# Altium PCB AFE.PcbDoc (part 1 of 2)
Units mm, origin at the board's own origin, x right, y up, seen from the top; angles counter-clockwise.
Board outline 80 x 100 mm, 4 copper layers (Top Copper, Signal Layer 1, Signal Layer 2, Bottom Copper), stack 1.57 mm thick; 79 components, 51 nets, 246 pads, 287 vias.
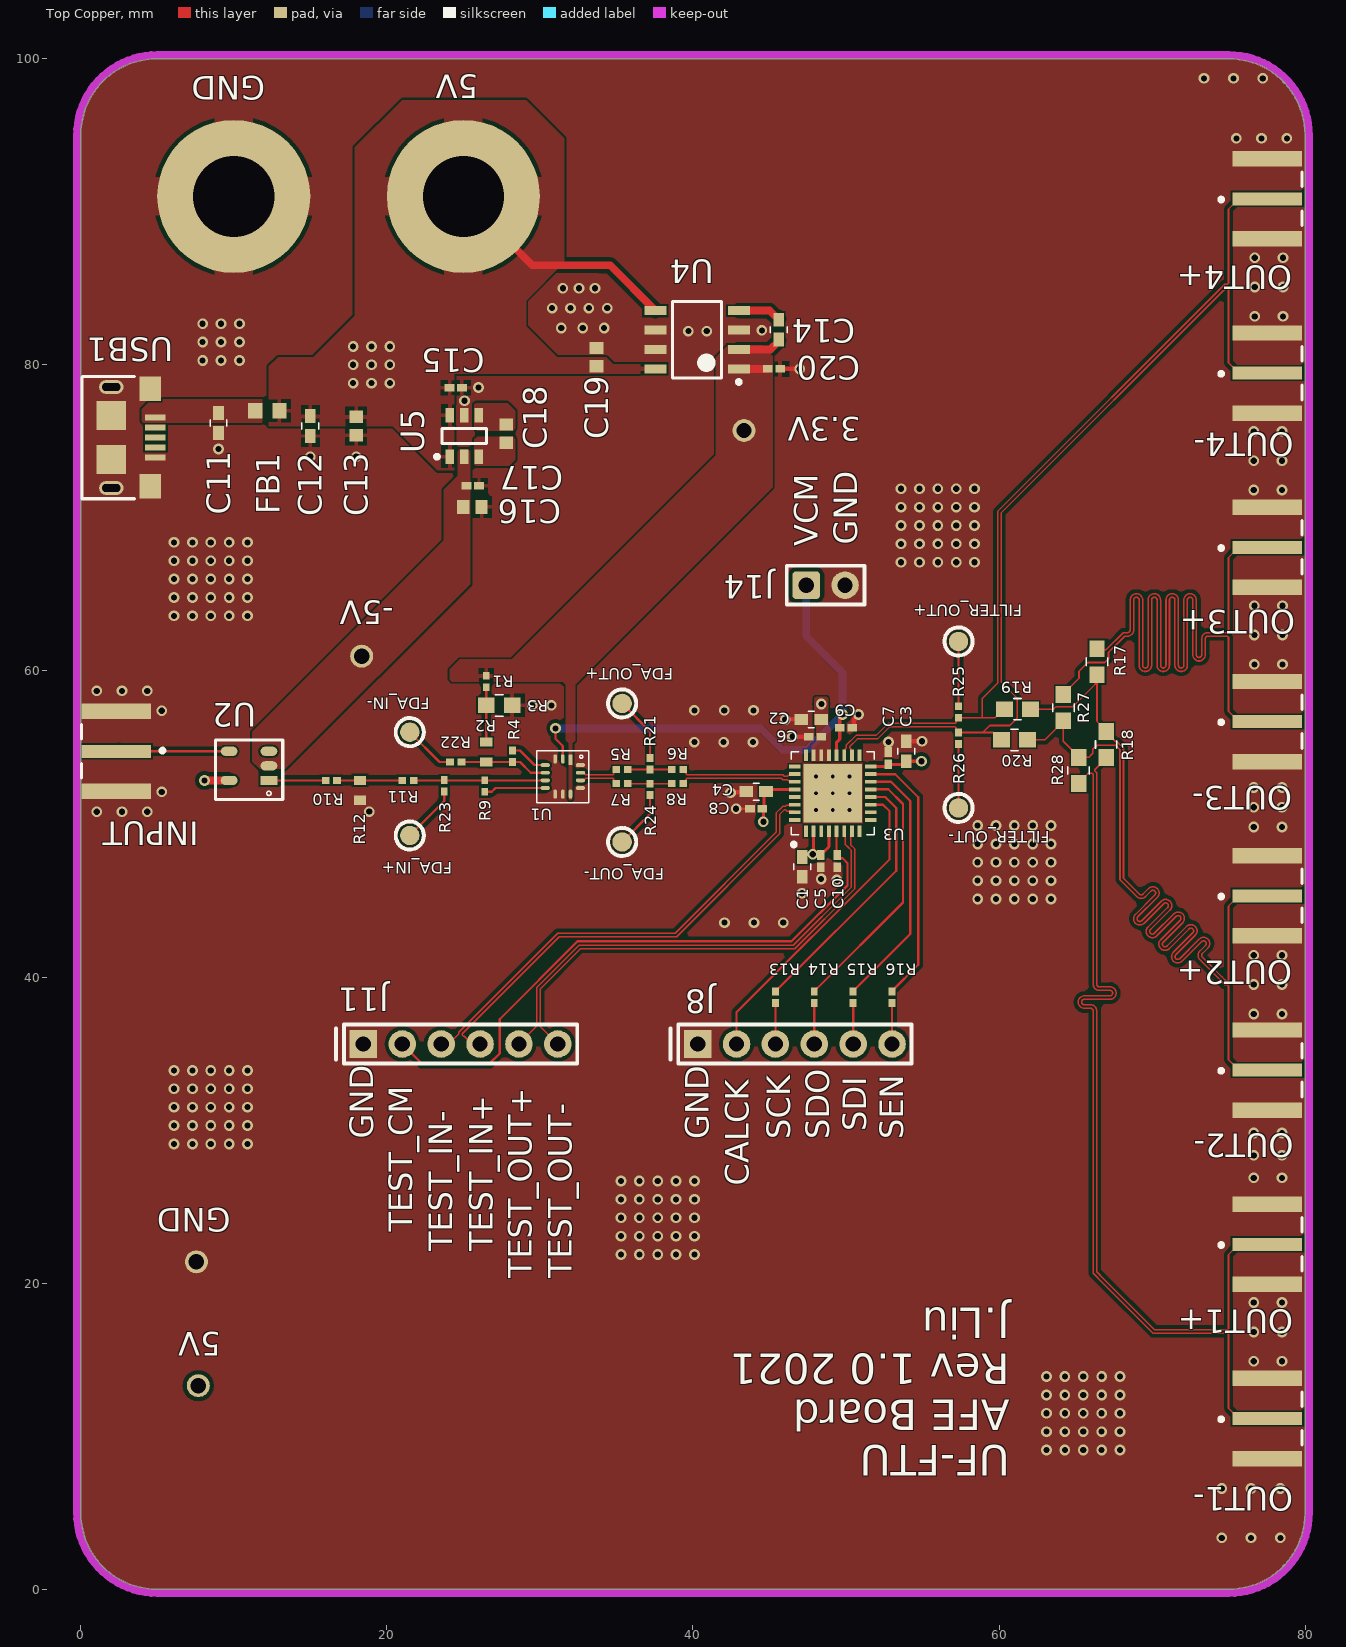
[diagram p0: Top Copper view]
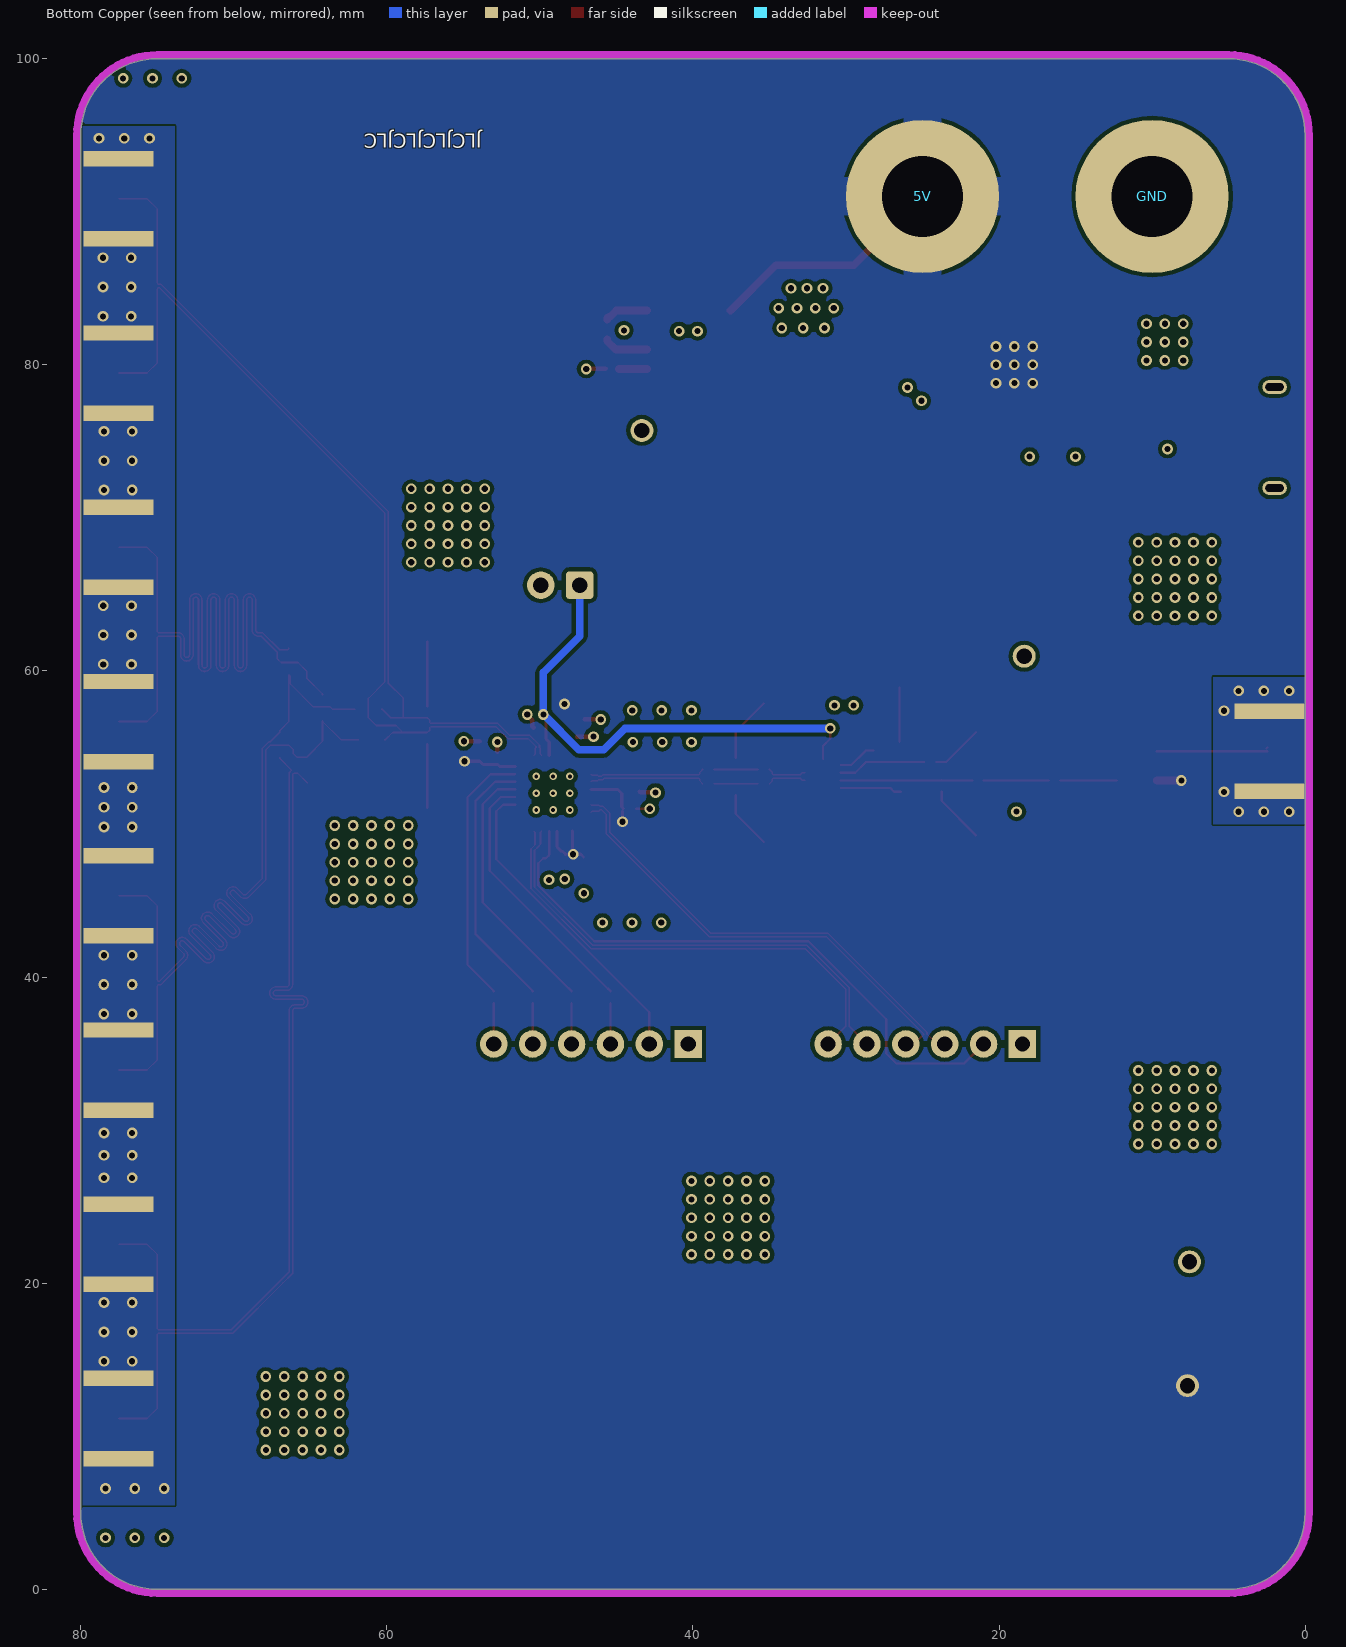
[diagram p1: Bottom Copper view, seen from below]
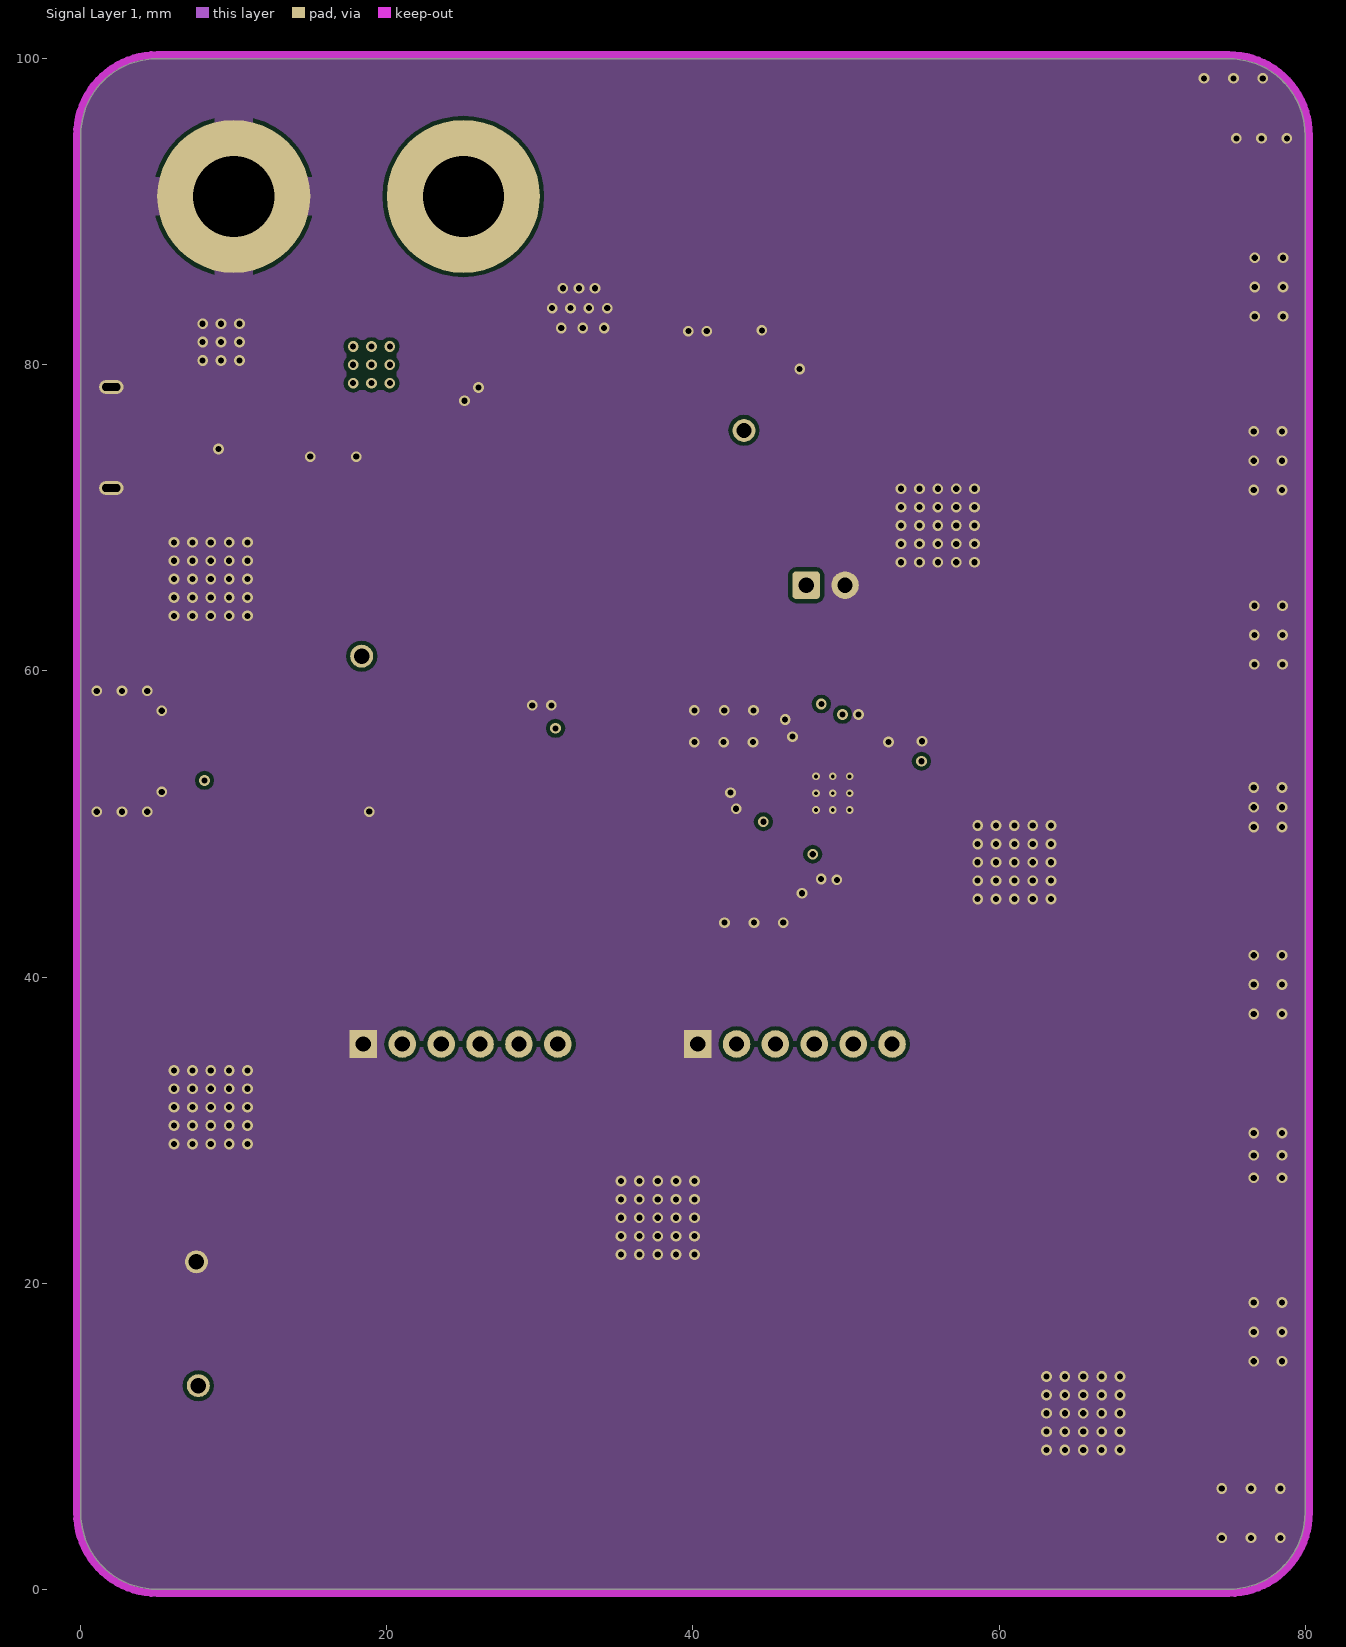
[diagram p2: Signal Layer 1]
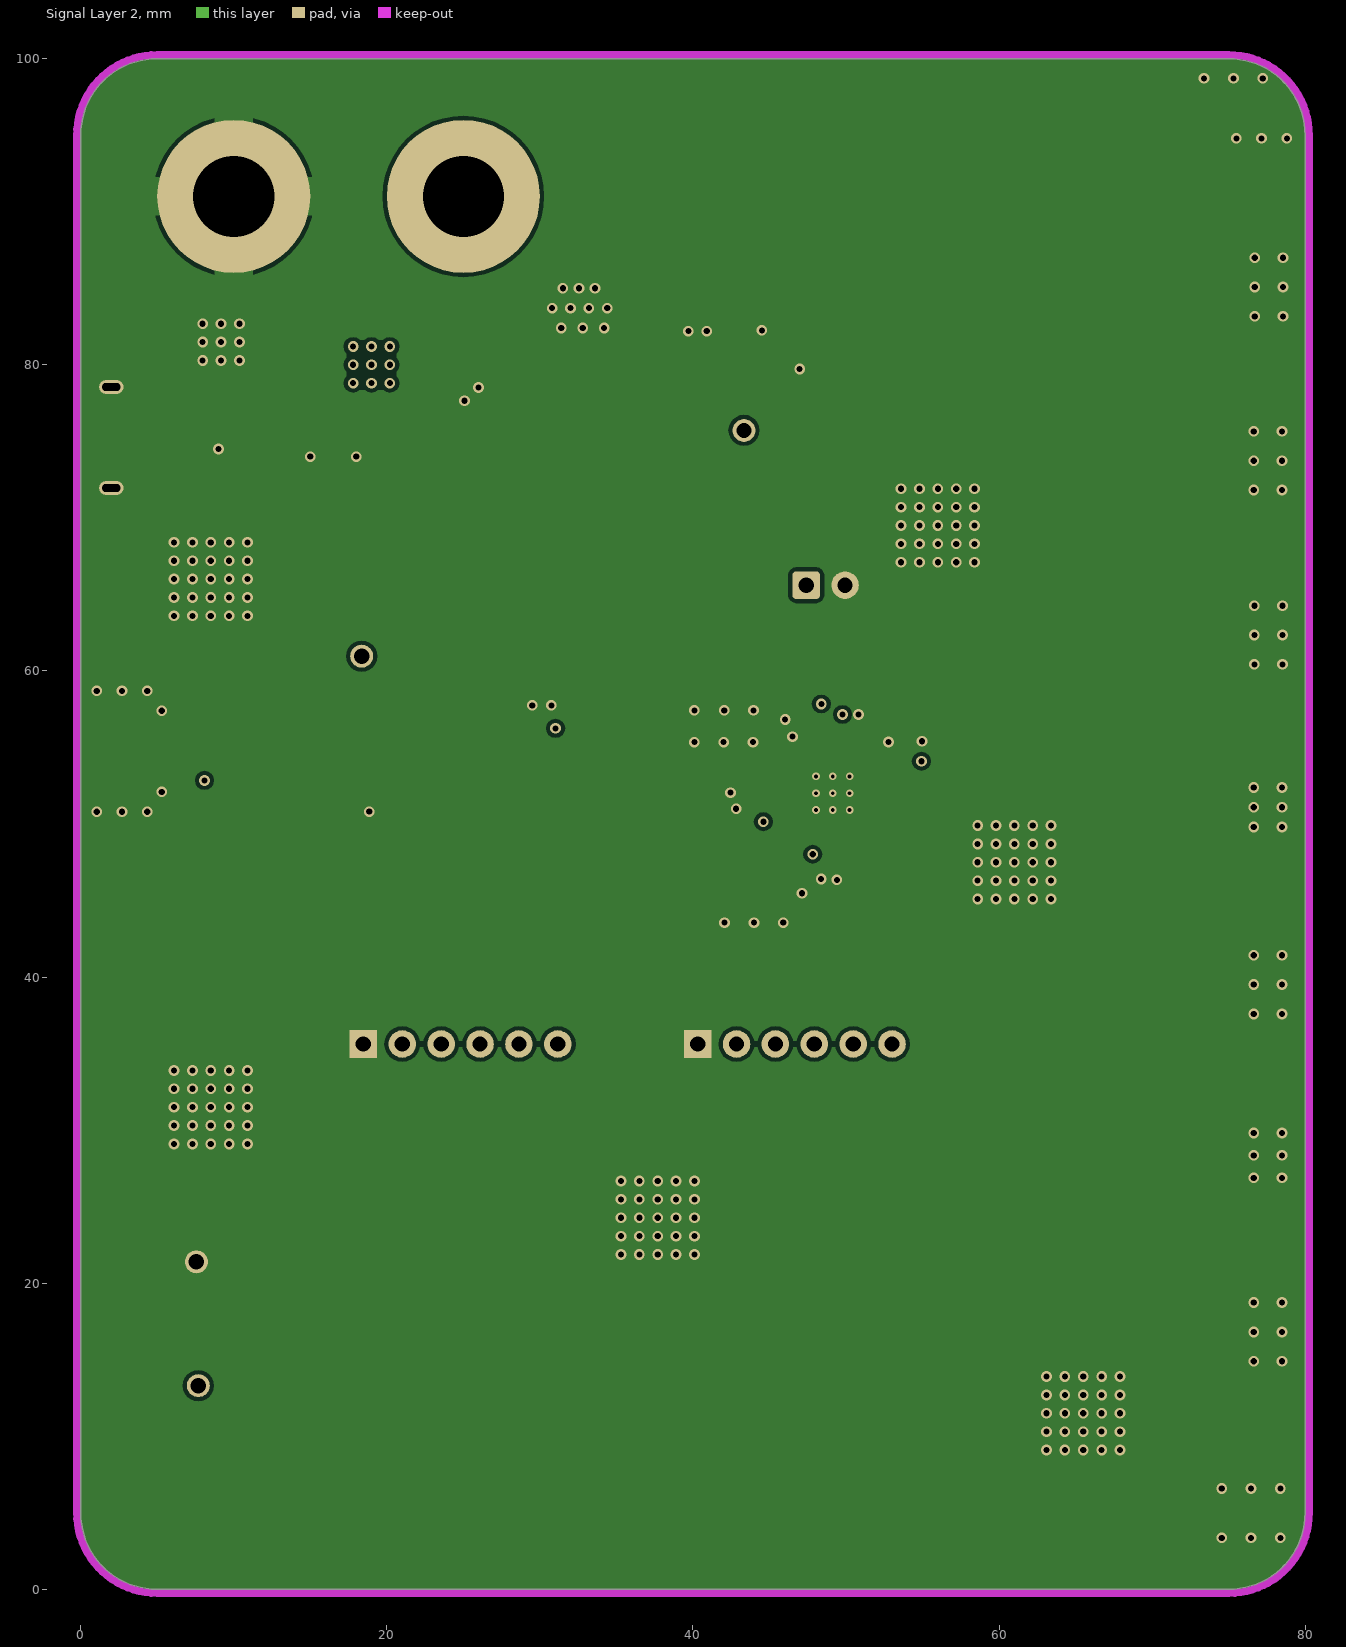
[diagram p3: Signal Layer 2]
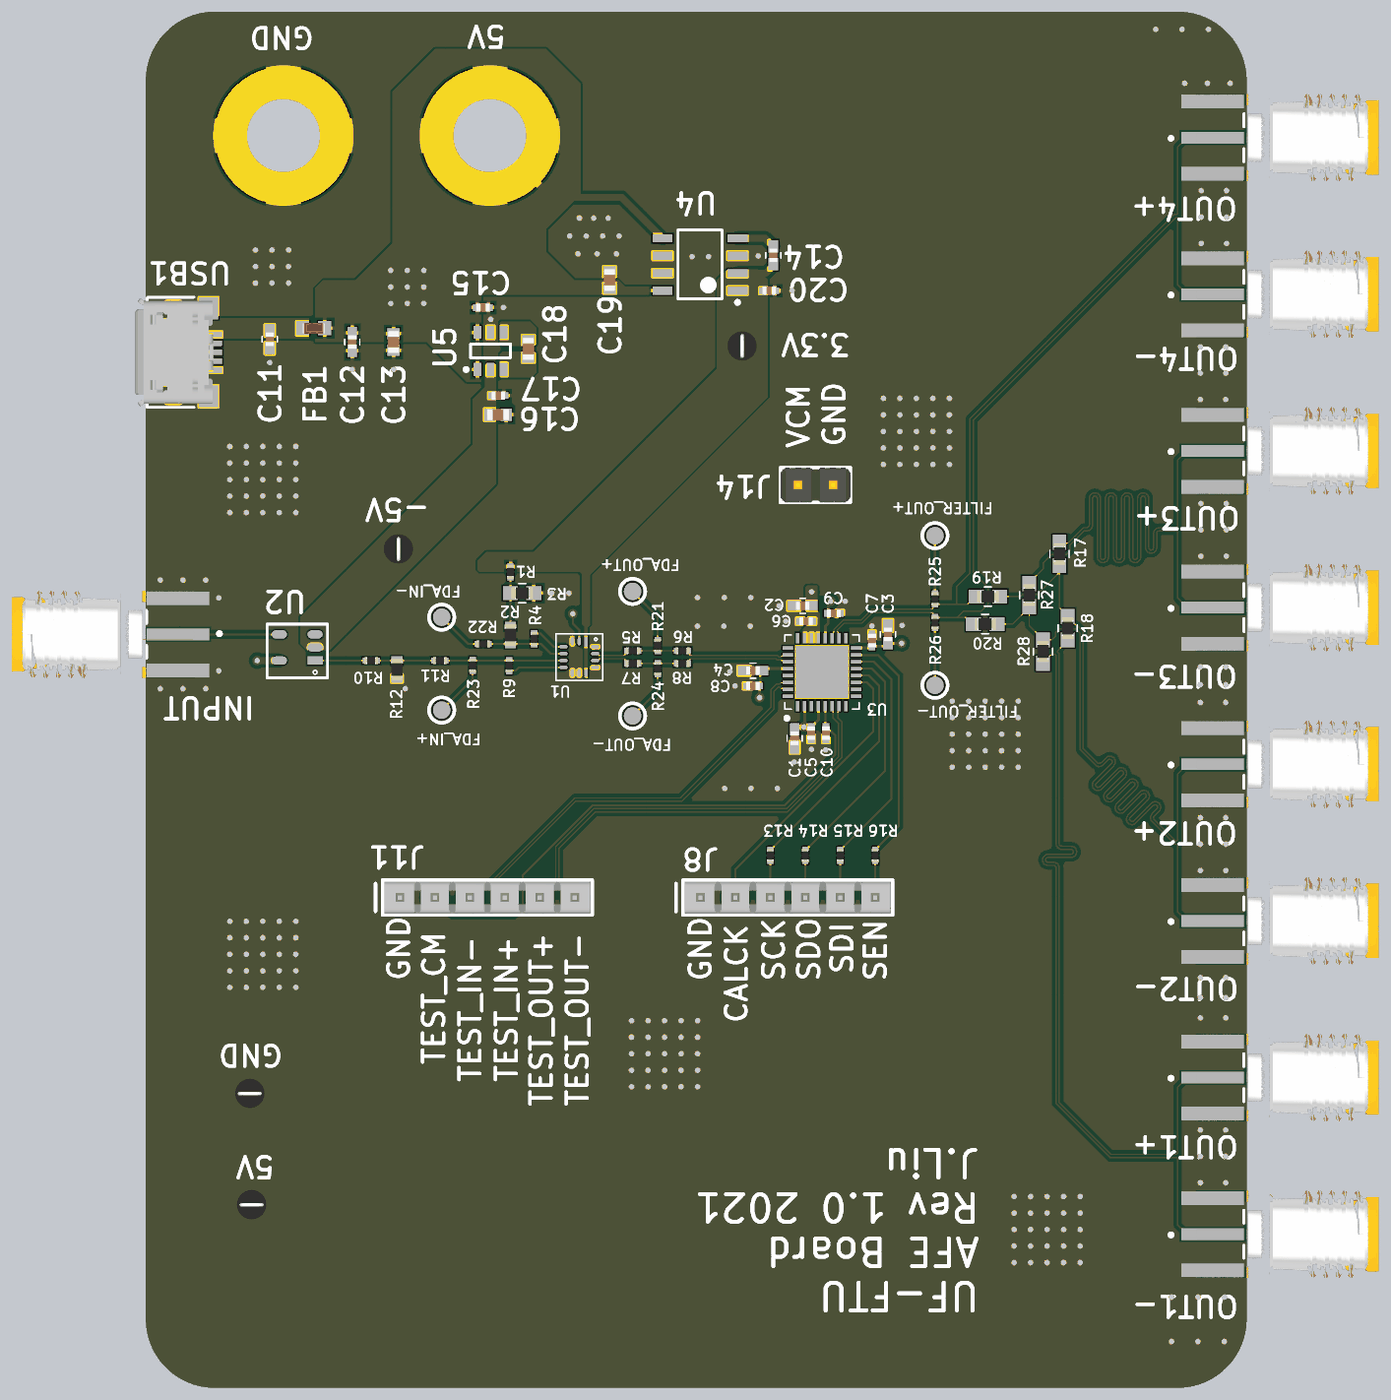
[diagram p4: 3D render of the assembled board from above, using the file's embedded part models]

## Layer stack, top to bottom
Top Mask: solder mask 0.015, Solder Resist, Dk 3.8
Top Copper: signal copper 0.035
Dielectric 1: prepreg 0.1, 2313, Dk 4.05
Signal Layer 1: signal copper 0.0175
Core: core 1.265, FR-4, Dk 4.5
Signal Layer 2: signal copper 0.0175
Dielectric 2: prepreg 0.1, 2313, Dk 4.05
Bottom Copper: signal copper 0.035
Bottom Mask: solder mask 0.015, Solder Resist, Dk 3.8

## Board outline
80,95 ccw(c75,95) 75,100 5,100 ccw(c5,95) 0,95 0,5 ccw(c5,5) 5,0 75,0 ccw(c75,5) 80,5

## Design rules (kind name [scope] priority, off if disabled: settings)
Clearance [All] p1: gap=0.254 ignorepadtopadclearanceinfootprint=FALSE except(0: Arc-Hole Track-Hole SMDPad-Hole THPad-Hole Via-Hole Fill-Hole Poly-Hole Region-Hole Text-Hole; 0.127: Arc-Arc Arc-Track Track-Track SMDPad-SMDPad SMDPad-Fill SMDPad-Poly SMDPad-Region Fill-Fill Fill-Poly Fill-Region Poly-Poly Poly-Region Region-Region; 0.2: Arc-SMDPad Track-SMDPad; 0.5: THPad-THPad)
DiffPairsRouting [InDifferentialPairClass('All Differential Pairs')] p1: maxlimit=0.152 minlimit=0.127 mostfreqgap=0.152 toplayer_maxgap=0.127 toplayer_prefgap=0.127 toplayer_minwidth=0.102 toplayer_maxwidth=0.102 toplayer_prefwidth=0.102 midlayer1_mingap=0.152 midlayer1_minwidth=0.09 midlayer1_maxwidth=0.09 midlayer1_prefwidth=0.09 midlayer2_mingap=0.152 midlayer2_minwidth=0.09 midlayer2_maxwidth=0.09 midlayer2_prefwidth=0.09 bottomlayer_maxgap=0.127 bottomlayer_prefgap=0.127 bottomlayer_minwidth=0.102 bottomlayer_maxwidth=0.102 bottomlayer_prefwidth=0.102 maxuncoupledlength=12.7
HoleSize [All] p1: absolutevalues=TRUE maxlimit=6 minlimit=0.25 maxpercent=80.000 minpercent=20.000
HoleToHoleClearance [All] p1: gap=0.5 allowstackedmicrovias=FALSE
PolygonConnect PolygonConnect_2 [All vs IsNamedPolygon('+5V_L01_P002')] p1: thpad.connectstyle=Relief thpad.reliefconductorwidth=0.254 thpad.reliefentries=4 thpad.polygonreliefangle="90 Angle" thpad.airgapwidth=0.254 smdpad.connectstyle=Relief smdpad.reliefconductorwidth=0.254 smdpad.reliefentries=4 smdpad.polygonreliefangle="90 Angle" smdpad.airgapwidth=0.254 via.connectstyle=Direct via.reliefconductorwidth=0.254 via.reliefentries=4 via.polygonreliefangle="90 Angle" via.airgapwidth=0.254
PolygonConnect PolygonConnect_1 [All vs IsNamedPolygon('+5V_L01_P002')] p2: connectstyle=Direct reliefconductorwidth=0.254 reliefentries=4 polygonreliefangle="90 Angle" airgapwidth=0.254
PolygonConnect [All] p3: connectstyle=Direct reliefconductorwidth=0.254 reliefentries=4 polygonreliefangle="90 Angle" airgapwidth=0.254
RoutingVias [All] p1: holewidth=0.25 width=0.45 viastyle="Through Hole" minholewidth=0.2 minwidth=0.45 maxholewidth=0.4 maxwidth=0.7
SolderMaskExpansion [All] p1: expansion=0.102 istentingtop=FALSE
Width [All] p1: maxlimit=0.508 minlimit=0.089 preferedwidth=0.147 midlayer1_minwidth=0.127 midlayer1_prefwidth=0.131 midlayer2_minwidth=0.127 midlayer2_prefwidth=0.131 minimp=50.000000 maximp=50.000000 favimp=50.000000
27 further rules are at their usual default settings.

## Classes and differential pairs
differential pair AFE_Out4: +AFE_Out1_P -AFE_Out1_N
differential pair AFE_Out3: +AFE_Out2_P -AFE_Out2_N
differential pair AFE_Out2: +AFE_Out3_P -AFE_Out3_N
differential pair AFE_Out1: +AFE_Out4_P -AFE_Out4_N
differential pair FDA_OUT: +FDA_OUT_P -FDA_OUT_N
differential pair FDA_OUT_PR: +FDA_OUT_PR_P -FDA_OUT_PR_N
differential pair TEST_OUT: +TEST_OUT_P -TEST_OUT_N
differential pair TEST_IN: +TEST_IN_P -TEST_IN_N
differential pair FILTER_IN: +FILTER_IN_P -FILTER_IN_N

## Components (designator, comment, footprint, x,y, rotation, side; value= is the part's Value field where it differs from the comment)
3.3V "Testpoint_TH" Testpoint_TH 43.335,75.712 r0 top (schematic designator TP8)
5V "Testpoint_TH" Testpoint_TH 7.687,13.307 r90 top (schematic designator TP7)
5V "Banana Jack" "Banana Jack" 25,91 r180 bottom (schematic designator J12)
-5V "Testpoint_TH" Testpoint_TH 18.357,60.965 r0 top (schematic designator TP9)
C1 "C0402 100pF 50V C0G" C0402-IPC 47.15,47.199 r90 top value=100pF
C2 "C0402 100pF 50V C0G" C0402-IPC 47.733,56.828 r0 top value=100pF
C3 "C0402 100pF 50V C0G" C0402-IPC 53.933,54.752 r270 top value=100pF
C4 "C0402 100pF 50V C0G" C0402-IPC 44.128,52.116 r0 top value=100pF
C5 "GRM155R71H104KE14D" C0402-HIGH-DENSITY 48.35,47.575 r90 top value=0.1uF
C6 "GRM155R71H104KE14D" C0402-HIGH-DENSITY 47.981,55.707 r0 top value=0.1uF
C7 "GRM155R71H104KE14D" C0402-HIGH-DENSITY 52.773,54.303 r270 top value=0.1uF
C8 "GRM155R71H104KE14D" C0402-HIGH-DENSITY 44.128,51.007 r0 top value=0.1uF
C9 "GRM155R71H104KE14D" C0402-HIGH-DENSITY 49.998,56.281 r180 top value=0.1uF
C10 "GRM155R71H104KE14D" C0402-HIGH-DENSITY 49.425,47.575 r90 top value=0.1uF
C11 "C0402 10nF 16V X7R" C0402-IPC 9,76.2 r90 top value=10nF
C12 "C0402 100nF 16V X7R" C0402-IPC 15,76 r90 top value=100nF
C13 "4.7uF, 25V, X5R, 0603" C0603-HIGH-DENSITY 18,76 r90 top value=4.7uF
C14 "C0402 10nF 16V X7R" C0402-IPC 45.6,82.3 r270 top value=10nF
C15 "C0402 10uF 10V" C0402-HIGH-DENSITY 24.5,78.5 r180 top value=10uF
C16 "4.7uF, 25V, X5R, 0603" C0603-HIGH-DENSITY 25.593,70.715 r180 top value=4.7uF
C17 "C0402 10uF 10V" C0402-HIGH-DENSITY 25.619,72.1 r180 top value=10uF
C18 "1uF" C0603-HIGH-DENSITY 27.8,75.5 r90 top
C19 "1uF" C0603-HIGH-DENSITY 33.7,80.5 r270 top
C20 "C0402 10uF 10V" C0402-HIGH-DENSITY 45.3,79.73 r180 top value=10uF
FB1 "BK1608HS220-T" L0603 12.2,77 r0 top
FDA_IN+ "Testpoint_SMT" TESTPOINT_SMT 21.5,49.25 r0 top (schematic designator TP3)
FDA_IN- "Testpoint_SMT" TESTPOINT_SMT 21.5,56 r0 top (schematic designator TP2)
FDA_OUT+ "Testpoint_SMT" TESTPOINT_SMT 35.375,57.875 r0 top (schematic designator TP1)
FDA_OUT- "Testpoint_SMT" TESTPOINT_SMT 35.375,48.825 r0 top (schematic designator TP4)
FILTER_OUT+ "Testpoint_SMT" TESTPOINT_SMT 57.35,61.925 r0 top (schematic designator TP5)
FILTER_OUT- "Testpoint_SMT" TESTPOINT_SMT 57.35,51.05 r0 top (schematic designator TP6)
GND "Testpoint_TH" Testpoint_TH 7.56,21.394 r90 top (schematic designator TP10)
GND "Banana Jack" "Banana Jack" 10,91 r180 bottom (schematic designator J13)
INPUT "SMA" "SMA Edge Launch (Horizontal)" -4.7,54.75 r90 top (schematic designator J1)
J8 "100 mil hdr 6 pos" "100MIL HDR 6 POS" 40.308,35.627 r0 top
J11 "100 mil hdr 6 pos" "100MIL HDR 6 POS" 18.471,35.627 r0 top
J14 "Header 1X2" "Header 1x2 TH Pitch 2.54mm" 47.4,65.6 r0 top
OUT1+ "SMA" "SMA Edge Launch (Horizontal)" 84.55,22.544 r270 top locked (schematic designator J9)
OUT1- "SMA" "SMA Edge Launch (Horizontal)" 84.55,11.16 r270 top locked (schematic designator J10)
OUT2+ "SMA" "SMA Edge Launch (Horizontal)" 84.55,45.312 r270 top locked (schematic designator J6)
OUT2- "SMA" "SMA Edge Launch (Horizontal)" 84.55,33.928 r270 top locked (schematic designator J7)
OUT3+ "SMA" "SMA Edge Launch (Horizontal)" 84.55,68.079 r270 top locked (schematic designator J4)
OUT3- "SMA" "SMA Edge Launch (Horizontal)" 84.55,56.695 r270 top locked (schematic designator J5)
OUT4+ "SMA" "SMA Edge Launch (Horizontal)" 84.55,90.847 r270 top locked (schematic designator J2)
OUT4- "SMA" "SMA Edge Launch (Horizontal)" 84.55,79.463 r270 top locked (schematic designator J3)
R1 "R0402 1k 1%" R0402-HIGH-DENSITY 26.5,59.3 r270 top value=1k
R2 "806R" R0603-HIGH-DENSITY 26.5,54.703 r270 top
R3 "R0603 243 1%" R0603-IPC 27.35,57.75 r180 top value=243
R4 "R0402 1k 1%" R0402-HIGH-DENSITY 28.222,54.428 r90 top value=1k
R5 "R0402 51 1%" R0402-HIGH-DENSITY 35.372,53.56 r0 top value=50
R6 "R0402 0R" R0402-HIGH-DENSITY 39,53.56 r0 top value=0
R7 "R0402 51 1%" R0402-HIGH-DENSITY 35.372,52.64 r0 top value=50
R8 "R0402 0R" R0402-HIGH-DENSITY 39,52.64 r0 top value=0
R9 "R0402 1k 1%" R0402-HIGH-DENSITY 26.399,52.475 r270 top value=1k
R10 "R0402 1k 1%" R0402-HIGH-DENSITY 16.375,52.85 r0 top value=1k
R11 "475R" R0402-HIGH-DENSITY 21.375,52.85 r0 top
R12 "1.07k" R0603-HIGH-DENSITY 18.25,52.2 r90 top
R13 "R0402 100R 1%" R0402-HIGH-DENSITY 45.388,38.685 r270 top value=100
R14 "R0402 100R 1%" R0402-HIGH-DENSITY 47.928,38.685 r270 top value=100
R15 "R0402 100R 1%" R0402-HIGH-DENSITY 50.468,38.685 r270 top value=100
R16 "R0402 100R 1%" R0402-HIGH-DENSITY 53.008,38.685 r270 top value=100
R17 "R0603 0" R0603-IPC 66.4,60.6 r90 top value=0
R18 "R0603 0" R0603-IPC 67,55.2 r270 top value=0
R19 "R0603 0" R0603-IPC 61.2,57.5 r0 top value=0
R20 "R0603 0" R0603-IPC 61,55.5 r0 top value=0
R21 "R0402 0R" R0402-HIGH-DENSITY 37.2,53.935 r270 top value=0
R22 "R0402 0R" R0402-HIGH-DENSITY 24.5,54.053 r0 top value=0
R23 "R0402 0R" R0402-HIGH-DENSITY 23.75,52.5 r90 top value=0
R24 "R0402 0R" R0402-HIGH-DENSITY 37.2,52.265 r90 top value=0
R25 "R0402 0R" R0402-HIGH-DENSITY 57.35,57.317 r270 top value=0
R26 "R0402 0R" R0402-HIGH-DENSITY 57.35,55.602 r90 top value=0
R27 "R0603 0" R0603-IPC 64.2,57.6 r270 top value=0
R28 "R0603 0" R0603-IPC 65.2,53.5 r90 top value=0
U1 "LMH5401" LMH5401 31.5,53.1 r270 top
U2 "LMH6559" LMH6559 11,53.8 r180 top
U3 "HMC1023LP5E" HMC1023 49.137,52.012 r90 top
U4 "LT1763-3.3" LT1763-3.3 40.275,81.635 r180 top
U5 "LTC1983-5" LTC1983-5 25.05,75.35 r90 top
USB1 "USB micro-B" USB-MicroB 2,75.25 r270 top locked

## Footprints (in the part's own frame and the unit in brackets; to place one, negate y for a bottom-side part, rotate by r counter-clockwise, add the part's x,y. Pads: shape width x height; smd on the part's side, far side on the other; paste and mask are expansions set on the pad)
"100MIL HDR 6 POS" [mm]
  rect 1.8x1.8 hole 1: 1(0,0)
  round 1.8 hole 1: 2(2.54,0) 3(5.08,0) 4(7.62,0) 5(10.16,0) 6(12.7,0)
  silkscreen extent -1.78,-1.27 13.97,1.27, body extent -1.12,-1.17 13.82,1.17, height 10.03
"Banana Jack" [mm] "JACK NON-INSULATED .350\""
  round 10 hole 5.3: 1(0,0)
C0402-HIGH-DENSITY [mil] "Chip Capacitor, 2-Leads, Body 1.02x0.51mm, IPC High Density"
  rect 25x19 smd: 1(-16,0) 2(16,0)
  body extent -20,-12 20,12, height 8
C0402-IPC [mm]
  rect 0.9x0.7 smd: 1(-0.65,0) 2(0.65,0)
  silkscreen extent -0.2,-0.55 0.2,0.55, body extent -0.5,-0.3 0.5,0.3, height 0.2
C0603-HIGH-DENSITY [mm] "Chip Capacitor, 2-Leads, Body 1.60x0.80mm, IPC High Density"
  rect 0.8x0.9 smd: 1(-0.6,0) 2(0.6,0)
  body extent -0.8,-0.4 0.8,0.4, height 0.3
"Header 1x2 TH Pitch 2.54mm" [mm] "PinHeader 1x2 TH Pitch 2.54mm"
  rrect25% 1.8x1.8 hole 1: 1(0,0)
  round 1.8 hole 1: 2(2.54,0)
  silkscreen extent -1.27,-1.27 3.81,1.27, body extent -1.27,-1.27 3.81,1.27, height 9.5
HMC1023 [mm] "QFN, 32-Leads, Body 5.00x5.00mm, Pitch 0.50mm, Thermal Pad 3.80x3.80mm, IPC Medium Density"
  rect 0.75x0.25 smd: 1(-2.475,1.75) 2(-2.475,1.25) 3(-2.475,0.75) 4(-2.475,0.25) 5(-2.475,-0.25) 6(-2.475,-0.75) 7(-2.475,-1.25) 8(-2.475,-1.75) 17(2.475,-1.75) 18(2.475,-1.25) 19(2.475,-0.75) 20(2.475,-0.25) 21(2.475,0.25) 22(2.475,0.75) 23(2.475,1.25) 24(2.475,1.75)
  rect 0.25x0.75 smd: 9(-1.75,-2.475) 10(-1.25,-2.475) 11(-0.75,-2.475) 12(-0.25,-2.475) 13(0.25,-2.475) 14(0.75,-2.475) 15(1.25,-2.475) 16(1.75,-2.475) 25(1.75,2.475) 26(1.25,2.475) 27(0.75,2.475) 28(0.25,2.475) 29(-0.25,2.475) 30(-0.75,2.475) 31(-1.25,2.475) 32(-1.75,2.475)
  rect 3.8x3.8 smd: 33(0,0)
  silkscreen extent -3.47,-2.7 2.7,2.7, body extent -2.55,-2.55 2.55,2.55, height 1
L0603 [mm]
  rect 0.94x1.02 smd: 1(-0.79,0) 2(0.79,0)
  body extent -0.8,-0.4 0.8,0.4, height 1
LMH5401 [mm]
  rect 0.7x0.25 smd: 1(-1.1,0.5)
  oval 0.6x0.25 smd: 2(-1.15,0) 3(-1.15,-0.5) 8(1.15,-0.5) 9(1.15,0) 10(1.15,0.5)
  oval 0.25x0.6 smd: 4(-0.75,-1.15) 5(-0.25,-1.15) 6(0.25,-1.15) 7(0.75,-1.15) 11(0.75,1.15) 12(0.25,1.15) 13(-0.25,1.15) 14(-0.75,1.15)
  silkscreen extent -1.7,-1.7 1.7,1.7
LMH6559 [mm]
  rect 1.1x0.6 smd mask+0.07: 1(-1.3,0.95)
  oval 1.1x0.6 smd mask+0.07: 2(-1.3,0) 3(-1.3,-0.95) 4(1.3,-0.95) 5(1.3,0.95)
  silkscreen extent -2.2,-1.7 2.2,2.2
LT1763-3.3 [mm] "SOIC, 8-Leads, Body 4.90x3.90mm, Pitch 1.27mm, IPC Medium Density"
  rect 1.45x0.6 smd: 1(-2.725,1.905) 2(-2.725,0.635) 3(-2.725,-0.635) 4(-2.725,-1.905) 5(2.725,-1.905) 6(2.725,-0.635) 7(2.725,0.635) 8(2.725,1.905)
  silkscreen extent -2.85,-2.5 1.6,2.88, body extent -2,-2.5 2,2.5, height 1.76
LTC1983-5 [mm] "SOT23, 6-Leads, Body 2.90x2.80mm, Pitch 0.95mm, IPC Medium Density"
  rect 0.95x0.55 smd: 1(-1.35,0.95) 2(-1.35,0) 3(-1.35,-0.95) 4(1.35,-0.95) 5(1.35,0) 6(1.35,0.95)
  silkscreen extent -1.47,-1.45 0.5,1.9, body extent -0.87,-1.45 0.87,1.45, height 1
R0402-HIGH-DENSITY [mm] "Chip Resistor, 2-Leads, Body 1.00x0.50mm, IPC High Density"
  rect 0.5x0.45 smd: 1(-0.375,0) 2(0.375,0)
  body extent -0.5,-0.25 0.5,0.26, height 0.34
R0603-HIGH-DENSITY [mm] "Chip Resistor, 2-Leads, Body 1.60x0.80mm, IPC High Density"
  rect 0.6x0.8 smd: 1(-0.65,0) 2(0.65,0)
  body extent -0.77,-0.43 0.78,0.43, height 0.44
R0603-IPC [mm]
  rect 1.1x1 smd: 1(-0.85,0) 2(0.85,0)
  silkscreen extent -0.25,-0.7 0.25,0.7, body extent -0.77,-0.43 0.78,0.43, height 0.44
"SMA Edge Launch (Horizontal)" [mm]
  rect 0.85x4.56 smd paste+0 mask+0: 1(0,-7.03)
  rect 1x4.56 smd paste+0 mask+0: 2(-2.62,-7.03) 2(2.62,-7.03)
  rect 1x4.56 smd far side paste+0 mask+0: 2(-2.62,-7.03) 2(2.62,-7.03)
  silkscreen extent -1.75,-10.17 1.75,-4.75, body extent -3.19,-8.25 3.19,5.05, height 3.58
TESTPOINT_SMT [mm]
  round 1.27 smd: 1(0,0)
  silkscreen extent -0.92,-0.92 0.92,0.92
Testpoint_TH [mm]
  round 1.5 hole 1: 1(0,0)
  body extent -1.07,-1.07 1.07,1.06, height 4.57
USB-MicroB [mm] "CONN RCPT USB TYPE B 3A"
  oval 0.9x1.6 hole 0.5 slot 1.2 at 90 deg: 0(-3.3,0) 0(3.3,0)
  rect 1.6x1.4 smd: 0(-3.2,2.55) 0(3.2,2.55)
  rect 1.9x1.9 smd: 0(-1.45,0) 0(1.45,0)
  rect 0.4x1.35 smd: 1(-1.3,2.875) 2(-0.65,2.875) 3(0,2.875) 4(0.65,2.875) 5(1.3,2.875)
  silkscreen extent -4,-1.9 4,1.5, body extent -3.93,-2.76 3.93,2.9, height 2.88

## Part data
3.3V 5V -5V GND: "Through-hole testpoint hook"
5V GND: "JACK NON-INSULATED .350\"", Supplier Part Number 1=36-575-8-ND, Supplier 1=Digi-Key
C1 C2 C3 C4: "Chip Capacitor, 0402, 100p, 1%, 50V, C0G", Max. Voltage=50V, Supplier Part Number 1=490-7753-1-ND, EIA Code=C0G, Supplier 1=Digi-Key
C5 C6 C7 C8 C9 C10: library part "C0402 0.1uF 50V X7R", "Chip Capacitor, 0402, 0.10uF, 50V, X7R", Supplier Part Number 1=490-10700-1-ND, Supplier 1=Digi-Key
C11 C14: "Chip Capacitor, 0402, 10nF, 16V, X7R", Max. Voltage=16V, Supplier Part Number 1=490-1313-1-ND, EIA Code=X5R, Supplier 1=Digi-Key
C12: "Chip Capacitor, 0402, 100nF, 16V, X7R", Max. Voltage=16V, Supplier Part Number 1=490-6328-1-ND, EIA Code=X5R, Supplier 1=Digi-Key
C13 C16: library part "C0603 4.7uF 25V X5R", "Chip Capacitor, 0603, 4.7uF, 25V, X5R", Max. Voltage=25V, Supplier Part Number 1=490-7203-1-ND, EIA Code=X5R, Supplier 1=Digi-Key, Supplier 2=Mouser, Supplier 3=LCSC, Supplier Part Number 2=81-GRM188R61E475KE1D, Supplier Part Number 3=C90057
C15 C17 C20: "Chip Capacitor, 0402, 10uF, 10V, X5R", Max. Voltage=10V, Supplier Part Number 1=1276-1450-2-ND, EIA Code=X5R, Supplier 1=Digi-Key
C18 C19: library part "1uF 0603 35V X5R", "CAP CER 1UF 35V X5R 0603", Case/Package=0603, Manufacturer="Taiyo Yuden", Manufacturer Part Number=GMK107BJ105MAHT, Max Operating Temperature=85°C, Min Operating Temperature=-55°C, Ratings=AEC-Q200, Supplier Part Number 1=587-6315-1-ND, Tolerance=20%, Voltage Rating=35V, Capacitance=1uF, Category="Ceramic Capacitors", ComponentLink1Description=http://ds.yuden.co.jp/TYCOMPAS/ut/detail.do?productNo=GMK107BJ105MAHT&amp;fileName=GMK107BJ105MAHT_SS&amp;mode=specSheetDownload&src-supplier=Digi-Key, ComponentLink1URL=http://ds.yuden.co.jp/TYCOMPAS/ut/detail.do?productNo=GMK107BJ105MAHT&amp;fileName=GMK107BJ105MAHT_SS&amp;mode=specSheetDownload&src-supplier=Digi-Key, Mount="Surface Mount", Packaging="Tape and Reel", Pricing 1="1=0.19000, 10=0.13300, 50=0.07960, 100=0.06730, 500=0.04604, 1000=0.04073 (USD)", RoHS=Yes, RoHS Compliant=Yes, Stock 1=1779, Supplier 1=Digi-Key
FB1: "Ferrite Beads Multi-Layer 22Ohm 25% 100MHz 1.5A 0.05Ohm DCR 0603 T/R", Case Code (Imperial)=0603, Case Code (Metric)=1608, DC Resistance (DCR)=50mR, Frequency=100MHz, Manufacturer="Taiyo Yuden", Max Current Rating=1.5A, Max Operating Temperature=125°C, Min Operating Temperature=-55°C, Package Quantity=1, Supplier Part Number 1=587-1869-1-ND, Tolerance=25%, Case/Package=0603, Category="Ferrite Beads and Chips", ComponentLink1Description=https://datasheet.ciiva.com/1011/bk1608hs220-t-ss-1011861.pdf?src-supplier=Digi-Key, ComponentLink1URL=https://datasheet.ciiva.com/1011/bk1608hs220-t-ss-1011861.pdf?src-supplier=Digi-Key, ComponentLink2Description=https://datasheet.ciiva.com/1011/mlci07-e-1011862.pdf?src-supplier=Digi-Key, ComponentLink2URL=https://datasheet.ciiva.com/1011/mlci07-e-1011862.pdf?src-supplier=Digi-Key, ComponentLink3Description=https://datasheet.ciiva.com/1011/mlci07-e-1011863.pdf?src-supplier=Digi-Key, ComponentLink3URL=https://datasheet.ciiva.com/1011/mlci07-e-1011863.pdf?src-supplier=Digi-Key, ComponentLink4Description=https://datasheet.ciiva.com/5821/mlci07-e-5821271.pdf?src-supplier=Farnell, ComponentLink4URL=https://datasheet.ciiva.com/5821/mlci07-e-5821271.pdf?src-supplier=Farnell, ComponentLink5Description=https://datasheet.ciiva.com/7620/1734576-7620028.pdf?src-supplier=Element14, ComponentLink5URL=https://datasheet.ciiva.com/7620/1734576-7620028.pdf?src-supplier=Element14, Core Material=Ferrite, Depth=0.95mm, Halogen Free="Halogen Free", Height=0.037inch, Impedance=22R, Lead Free="Lead Free", Length=0.063inch, Manufacturer Part Number=BK1608HS220-T, Max DC Current=1.5A, Mount="Surface Mount", Number of Lines=1, Number of Pins=2, Packaging="Tape and Reel", Pricing 1="1=0.10000, 10=0.07200, 25=0.06560, 50=0.05900, 100=0.04320, 250=0.03144, 500=0.02882, 1000=0.02489 (USD)", REACH SVHC="No SVHC", Resistance=50mR, RoHS=Yes, RoHS Compliant=Yes, Series=BK, Shielding=Shielded, Stock 1=23669, Supplier 1=Digi-Key, Termination=SMD/SMT, Test Frequency=100MHz, Width=0.031inch
FDA_IN+ FDA_IN- FDA_OUT+ FDA_OUT- FILTER_OUT+ FILTER_OUT-: "SMT Test Point"
INPUT OUT1+ OUT1- OUT2+ OUT2- OUT3+ OUT3- OUT4+ OUT4-: "SMA Connector", Supplier Part Number 1=A97594-ND, Supplier 1=Digi-Key
J8 J11: "Header, 100 mil, 6pos, tin", Supplier Part Number 1=A31116-ND, Supplier 1=Digi-Key
R1 R4 R9 R10: "Chip Resistor, 0402, 1k ohms, 1%, 1/16 W", Supplier Part Number 1=311-1.00KLRCT-ND, Supplier 1=Digi-Key
R2: library part "806R 0603 0.5% 1/10W", "RES 806 OHM 0.5% 1/10W 0603", Case/Package=0603, Manufacturer="Stackpole Electronics", Manufacturer Part Number=RNCF0603DTE806R, Max Operating Temperature=155°C, Min Operating Temperature=-55°C, Power Rating=63mW, Supplier Part Number 1=RNCF0603DTE806RCT-ND, Tolerance=0.5%, Category="Chip SMD Resistors", ComponentLink1Description=https://www.seielect.com/catalog/sei-rncf.pdf?src-supplier=Digi-Key, ComponentLink1URL=https://www.seielect.com/catalog/sei-rncf.pdf?src-supplier=Digi-Key, Mount="Surface Mount", Packaging="Tape and Reel", Pricing 1="1=0.13000, 10=0.11000, 100=0.04300, 1000=0.01800, 2500=0.01650 (USD)", Resistance=806R, RoHS=Yes, RoHS Compliant=Yes, Stock 1=7286, Supplier 1=Digi-Key
R3: "RES SMD 243 OHM 1% 1/10W 0603", Operating Temperature="-55°C ~ 155°C", Supplier Part Number 1=RMCF0603FT243RCT-ND, Temperature Coefficient=±100ppm/°C, Tolerance=±1%, Features="Automotive AEC-Q200", Supplier 1=Digi-Key
R5 R7: "Chip Resistor, 0402, 50 ohms, 1%, 1/10 W"
R6 R8 R21 R22 R23 R24 R25 R26: "Chip Resistor, 0402, 0 ohm jumper", Supplier Part Number 1=311-0.0JRCT-ND, Supplier 1=Digi-Key
R11: library part "475R 0402 1% 1/5W", "RES SMD 475 OHM 1% 1/5W 0402", Case/Package=0402, Manufacturer="Vishay Dale", Manufacturer Part Number=CRCW0402475RFKEDHP, Max Operating Temperature=155°C, Max Power Dissipation=125mW, Min Operating Temperature=-55°C, Package Quantity=10000, Resistor Type="Thick Film", Supplier Part Number 1=541-CRCW0402475RFKEDHPCT-ND, Temperature Coefficient=100ppm/°C, Tolerance=1%, Category="Chip SMD Resistors", ComponentLink1Description=https://datasheet.ciiva.com/8898/crcwhpe3-8898762.pdf?src-supplier=Avnet, ComponentLink1URL=https://datasheet.ciiva.com/8898/crcwhpe3-8898762.pdf?src-supplier=Avnet, ComponentLink2Description=https://datasheet.ciiva.com/2573/crcwhpe3-2573100.pdf?src-supplier=Digi-Key, ComponentLink2URL=https://datasheet.ciiva.com/2573/crcwhpe3-2573100.pdf?src-supplier=Digi-Key, Contact Plating=Tin, Features="Automotive AEC-Q200", Height=0.016inch, Lead Free="Lead Free", Length=0.039inch, Number of Terminations=2, Packaging="Tape and Reel", Pricing 1="1=0.14000, 10=0.12600, 100=0.04840, 1000=0.02130, 2500=0.01839, 5000=0.01646 (USD)", Radiation Hardening=No, Resistance=475R, RoHS=Yes, RoHS Compliant=Yes, Series=CRCW-HP, Stock 1=9500, Supplier 1=Digi-Key, Width=0.02inch
R12: library part "1.07k 0603 1% 1/10W", "RES SMD 1.07K OHM 1% 1/10W 0603", Case Code (Imperial)=0603, Case Code (Metric)=1608, Manufacturer="Stackpole Electronics", Manufacturer Part Number=RMCF0603FT1K07, Max Operating Temperature=155°C, Max Power Dissipation=100mW, Min Operating Temperature=-55°C, Resistance=1.07kR, Resistor Type="Thick Film", Supplier Part Number 1=RMCF0603FT1K07CT-ND, Temperature Coefficient=100ppm/°C, Tolerance=1%, Case/Package=0603, Category="Chip SMD Resistors", ComponentLink1Description=https://www.seielect.com/catalog/SEI-RMCF_RMCP.pdf?src-supplier=Avnet, ComponentLink1URL=https://www.seielect.com/catalog/SEI-RMCF_RMCP.pdf?src-supplier=Avnet, ComponentLink2Description=https://www.seielect.com/Catalog/SEI-RMCF_RMCP.pdf?src-supplier=Digi-Key, ComponentLink2URL=https://www.seielect.com/Catalog/SEI-RMCF_RMCP.pdf?src-supplier=Digi-Key, ComponentLink3Description=https://www.seielect.com/catalog/SEI-Packaging.pdf?src-supplier=Digi-Key, ComponentLink3URL=https://www.seielect.com/catalog/SEI-Packaging.pdf?src-supplier=Digi-Key, Contact Plating=Tin,Matte, Features="Automotive AEC-Q200", Height=0.022inch, Lead Free="Lead Free", Length=0.061inch, Mount="Surface Mount", Number of Terminations=2, Packaging="Tape and Reel", Pricing 1="1=0.10000, 10=0.01600, 100=0.00650, 1000=0.00292, 2500=0.00253 (USD)", Radiation Hardening=No, RoHS=Yes, RoHS Compliant=Yes, Series=RMCF, Stock 1=16341, Supplier 1=Digi-Key, Width=0.031inch
R13 R14 R15 R16: "Chip Resistor, 0402, 100 ohms, 1%, 1/16 W", Supplier Part Number 1=311-100LRCT-ND, Supplier 1=Digi-Key
R17 R18 R19 R20 R27 R28: "RES SMD 0 OHM JUMPER 1/10W 0603", Supplier Part Number 1=RMCF0603ZT0R00CT-ND, Supplier 1=Digi-Key
U1: "TEXAS INSTRUMENTS - LMH5401IRMST - DIFF AMP, 6.2GHZ, 17.5KV/US, UQFN-14", Frequency=2GHz, Manufacturer="Texas Instruments", Manufacturer Part Number=LMH5401IRMST, Max Dual Supply Voltage=2.625V, Max Operating Temperature=85°C, Max Supply Voltage=5.25V, Min Dual Supply Voltage=1.575V, Min Operating Temperature=-40°C, Min Supply Voltage=3.15V, Operating Supply Current=55mA, Operating Supply Voltage=5V, Output Current per Channel=50mA, Package Quantity=250, Supplier Part Number 1=296-38513-1-ND, -3db Bandwidth=1.2GHz, Bandwidth=8GHz, Category="Amplifiers - Op Amps, Buffer, Instrumentation", ComponentLink1Description=https://datasheet.ciiva.com/48505/lmh5401-48505045.pdf?src-supplier=Avnet, ComponentLink1URL=https://datasheet.ciiva.com/48505/lmh5401-48505045.pdf?src-supplier=Avnet, Gain=6dB, Gain Bandwidth Product=8GHz, Lead Free="Lead Free", Mount="Surface Mount", Number of Amplifiers=1, Number of Channels=1, Number of Circuits=1, Number of Pins=14, Packaging="Tape and Reel", Pricing 1="1=17.26000, 10=15.86500, 25=15.20760, 100=12.74150 (USD)", REACH SVHC="No SVHC", RoHS=Yes, RoHS Compliant=Yes, Slew Rate=17500V/µs, Stock 1=1716, Supplier 1=Digi-Key, Weight=0.000353oz
U2: "OP Amp Buffer Single GP 10V 5-Pin SOT-23 T/R", Case/Package=SOT-23, Input Bias Current=3uA, Input Offset Voltage (Vos)=3mV, Manufacturer="TI National Semiconductor", Manufacturer Part Number=LMH6559MF/NOPB, Max Operating Temperature=85°C, Max Supply Voltage=10V, Min Dual Supply Voltage=1.5V, Min Operating Temperature=-40°C, Min Supply Voltage=3V, Nominal Supply Current=10mA, Operating Supply Voltage=5V, Output Current=75mA, Output Current per Channel=74mA, Package Quantity=1000, Power Supply Rejection Ratio (PSRR)=44dB, Supplier Part Number 1=LMH6559MF/NOPBCT-ND, Voltage Gain=59.98dB, -3db Bandwidth=1.75GHz, Amplifier Type=BUFFER, Bandwidth=1.75GHz, Category="Amplifiers - Op Amps, Buffer, Instrumentation", ComponentLink1Description=https://datasheet.ciiva.com/15130/getdatasheetpartid-68437-15130143.pdf?src-supplier=Verical, ComponentLink1URL=https://datasheet.ciiva.com/15130/getdatasheetpartid-68437-15130143.pdf?src-supplier=Verical, ComponentLink2Description=https://datasheet.ciiva.com/2975/lmh6559-2975204.pdf?src-supplier=Avnet, ComponentLink2URL=https://datasheet.ciiva.com/2975/lmh6559-2975204.pdf?src-supplier=Avnet, ComponentLink3Description=https://datasheet.ciiva.com/2975/lmh6559-2975205.pdf?src-supplier=Avnet, ComponentLink3URL=https://datasheet.ciiva.com/2975/lmh6559-2975205.pdf?src-supplier=Avnet, ComponentLink4Description=https://datasheet.ciiva.com/6630/lmh6559-6630632.pdf?src-supplier=Digi-Key, ComponentLink4URL=https://datasheet.ciiva.com/6630/lmh6559-6630632.pdf?src-supplier=Digi-Key, ComponentLink5Description=https://datasheet.ciiva.com/6630/lmh6559-6630633.pdf?src-supplier=Digi-Key, ComponentLink5URL=https://datasheet.ciiva.com/6630/lmh6559-6630633.pdf?src-supplier=Digi-Key, ComponentLink6Description=https://datasheet.ciiva.com/6630/lmh6559-6630634.pdf?src-supplier=Digi-Key, ComponentLink6URL=https://datasheet.ciiva.com/6630/lmh6559-6630634.pdf?src-supplier=Digi-Key, ComponentLink7Description=https://datasheet.ciiva.com/4756/lmh6559-4756997.pdf?src-supplier=Mouser, ComponentLink7URL=https://datasheet.ciiva.com/4756/lmh6559-4756997.pdf?src-supplier=Mouser, ComponentLink8Description=https://datasheet.ciiva.com/14094/lmh6559-eng-tds-14094141.pdf?src-supplier=Distrelec, ComponentLink8URL=https://datasheet.ciiva.com/14094/lmh6559-eng-tds-14094141.pdf?src-supplier=Distrelec, ComponentLink9Description=https://datasheet.ciiva.com/26223/lmh6559-26223561.pdf?src-supplier=Avnet+Europe, ComponentLink9URL=https://datasheet.ciiva.com/26223/lmh6559-26223561.pdf?src-supplier=Avnet+Europe, Height=1.02mm, Lead Free="Lead Free", Length=2.92mm, Mount="Surface Mount", Number of Amplifiers=1, Number of Channels=1, Number of Circuits=1, Number of Elements=1, Number of Pins=5, Packaging="Tape and Reel", Pricing 1="1=2.89000, 10=2.59800, 25=2.45640, 100=2.01980, 250=1.81240, 500=1.74688 (USD)", Radiation Hardening=No, REACH SVHC="No SVHC", RoHS=No, Series=-, Slew Rate=4580V/µs, Stock 1=2784, Supplier 1=Digi-Key, Supply Current=10mA, Termination=SMD/SMT, Width=1.6mm
U3: "Active Filter Dual Low Pass Filter 6th Order 72MHz 32-Pin QFN Bulk", Case/Package=QFN, Frequency=100MHz, Manufacturer="Analog Devices", Max Frequency=72MHz, Max Operating Temperature=85°C, Max Supply Voltage=5.25V, Min Operating Temperature=-40°C, Min Supply Voltage=4.75V, Operating Supply Voltage=5V, Package Quantity=1, Supplier Part Number 1=1127-1662-ND, Bandwidth=72MHz, Category="Integrated Circuits (ICs)", ComponentLink1Description=https://datasheet.ciiva.com/29361/hmc1023lp5-29361744.pdf?src-supplier=Digi-Key, ComponentLink1URL=https://datasheet.ciiva.com/29361/hmc1023lp5-29361744.pdf?src-supplier=Digi-Key, Contact Plating=Tin,Matte, Height=0.039inch, Lead Free="Contains Lead", Length=0.197inch, Manufacturer Part Number=HMC1023LP5E, Mount="Surface Mount", Number of Channels=2, Number of Circuits=2, Number of Pins=32, Packaging="Cut Tape", Pricing 1="1=25.14000, 10=24.35000, 25=23.56480, 50=22.77960, 100=21.99400, 250=20.89432 (USD)", REACH SVHC=Unknown, RoHS=Yes, RoHS Compliant=Yes, Stock 1=38, Supplier 1=Digi-Key, Weight=0.006653oz, Width=0.197inch
U4: "LDO Regulator Pos 3.3V 0.5A Automotive 8-Pin SOIC N Tube", Case/Package=SOIC, Dropout Voltage=300mV, Manufacturer="Analog Devices / Linear Technology", Manufacturer Part Number=LT1763CS8-3.3#PBF, Max Input Voltage=20V, Max Operating Temperature=125°C, Max Output Current=500mA, Min Current Limit=520mA, Min Input Voltage=1.8V, Min Operating Temperature=-40°C, Nominal Output Voltage=3.3V, Operating Supply Current=30uA, Package Quantity=100, Power Supply Rejection Ratio (PSRR)=65dB, Reference Voltage=1.22V, Supplier Part Number 1=LT1763CS8-3.3#PBF-ND, Category="Voltage Regulators - Linear", ComponentLink1Description=https://datasheet.ciiva.com/14150/ef640087-e-14150152.pdf?src-supplier=Distrelec, ComponentLink1URL=https://datasheet.ciiva.com/14150/ef640087-e-14150152.pdf?src-supplier=Distrelec, ComponentLink2Description=https://datasheet.ciiva.com/2041/3903-2041558.pdf?src-supplier=Digi-Key, ComponentLink2URL=https://datasheet.ciiva.com/2041/3903-2041558.pdf?src-supplier=Digi-Key, ComponentLink3Description=https://datasheet.ciiva.com/5698/1599494-5698296.pdf?src-supplier=Farnell, ComponentLink3URL=https://datasheet.ciiva.com/5698/1599494-5698296.pdf?src-supplier=Farnell, Height=1.5mm, Lead Free="Lead Free", Length=5mm, Number of Outputs=1, Number of Pins=8, Number of Regulators=1, Output Current=500mA, Output Type=Fixed, Output Voltage=3.3V, Packaging=Rail/Tube, Polarity=Positive, Pricing 1="1=5.20000, 10=4.66700, 25=4.41240, 100=3.82400, 250=3.62784, 500=3.25526, 1000=2.77500 (USD)", Quiescent Current=30uA, REACH SVHC="No SVHC", RoHS=Yes, RoHS Compliant=Yes, Series=-, Stock 1=7556, Supplier 1=Digi-Key, Width=3.988mm
U5: "IC REG SWTCHD CAP INV -5V SOT23", Case/Package=SOT-23-6, Manufacturer="Analog Devices / Linear Technology", Manufacturer Part Number=LTC1983ES6-5#TRPBF, Max Input Voltage=5.5V, Max Operating Temperature=85°C, Max Output Current=100mA, Min Input Voltage=5V, Min Operating Temperature=-40°C, Min Supply Voltage=2.3V, Operating Supply Current=25uA, Output Voltage=-5.5V, Package Quantity=2500, Supplier Part Number 1=LTC1983ES6-5#TRPBFCT-ND, Switching Frequency=900kHz, Category="Voltage Regulators - Switching", ComponentLink1Description=https://datasheet.ciiva.com/15114/getdatasheetpartid-371063-15114160.pdf?src-supplier=Verical, ComponentLink1URL=https://datasheet.ciiva.com/15114/getdatasheetpartid-371063-15114160.pdf?src-supplier=Verical, ComponentLink2Description=https://datasheet.ciiva.com/26898/ltc1983es6-5-trpbf-26898763.pdf?src-supplier=IIIC, ComponentLink2URL=https://datasheet.ciiva.com/26898/ltc1983es6-5-trpbf-26898763.pdf?src-supplier=IIIC, ComponentLink3Description=https://datasheet.ciiva.com/2030/2135-2030773.pdf?src-supplier=Digi-Key, ComponentLink3URL=https://datasheet.ciiva.com/2030/2135-2030773.pdf?src-supplier=Digi-Key, Lead Free="Lead Free", Max Supply Voltage=5.5V, Number of Outputs=1, Number of Pins=6, Output Current=100mA, Output Type=Fixed, Packaging="Tape and Reel", Pricing 1="1=4.83000, 10=4.33900, 25=4.10240, 100=3.37290, 250=3.02652, 500=2.91712, 1000=2.42486 (USD)", Radiation Hardening=No, RoHS=Yes, RoHS Compliant=Yes, Series=-, Stock 1=5862, Supplier 1=Digi-Key, Synchronous Rectifier=No
USB1: "CONN RCPT USB TYPE B 3A", Manufacturer="Wurth Electronics Inc.", Manufacturer Part Number=629105150521, Supplier Part Number 1=609-4616-1-ND, Supplier 1=Digi-Key

## Via types
v1: diameter 0.7, hole 0.4, Top Copper to Bottom Copper, tented both sides, 278 vias
v2: diameter 0.5, hole 0.25, Top Copper to Bottom Copper, 9 vias

## Nets (pads, with @x,y where several pads share a name; then routed paths per layer and width w, separated by ;. In a path a pad name is that pad's centre, name@x,y a point inside that pad or via, vN(x,y) a via of type N, cw(c..) or ccw(c..) an arc to the next point about the centre after c; other vN are vias at no path point)
3.3V: 3.3V.1 C14.2 C20.2 R1.1 U1.1 U1.10 U4.1 U4.2 | length 4.8
  Top Copper w0.508: U4.1 C20.2@44.83,79.73 ; U4.2 45.05,81 45.6,81.55 C14.2
+5V: 5V.1 C1.2 C2.2 C3.2 C4.2 C5.2 C6.2 C7.2 C8.2 C12.2 C13.2 C15.2 C19.2 FB1.2 U2.5 U3.2 U3.4 U3.16 U3.21 U3.22 U3.23 U3.28 U4.5 U4.8 U5.1 U5.6 | length 29.2
  Top Copper w0.147: v1@47.85,48.025 48.317,48.025 C5.2@48.342,48.05 ; C5.2 C5.2@48.35,48.058
  Top Copper w0.203: C8.2 44.65,51.123 44.65,51.988 44.924,52.262 U3.28 ; v1(44.6,50.15) C8.2@44.6,50.829 ; C1.2 47.326,48.025 v1(47.825,48.025) 47.881,48.081 47.881,49.531 U3.2 ; C5.2@48.35,48.058 48.49,48.197 48.566,48.197 48.887,48.518 U3.4 ; U3.16 52.639,53.762 C7.2 53.726,53.896 C3.2 v1(54.928,54.102)
  Top Copper w0.508: v1(8.09,52.847) 9.697,52.847 U2.5 ; 5V.1@25,91 29.5,86.5 34.59,86.5 U4.5
  other v1: 48.387,57.844 17.8,78.8 19,78.8 20.2,78.8 17.8,80 19,80 20.2,80 17.8,81.2 19,81.2 20.2,81.2
-5V: -5V.1 C16.2 C17.2 U2.2 U5.2
AFE_In: INPUT.1 U2.4 | length 7.3
  Top Copper w0.147: INPUT.1@2.475,54.75 U2.4 ; INPUT.1@2.475,55 INPUT.1@2.525,54.95
AFE_Out1_N: OUT1-.1 R28.1 | length 55.8
  Top Copper w0.102: R28.1 65.2,52.7 65.806,53.306 66.091,53.306 66.15,53.247 66.15,39.702 66.15,39.537 ccw(c66.556,39.537) 66.556,39.131 67.242,39.131 cw(c67.242,38.953) 67.242,38.775 65.569,38.775 ccw(c65.569,38.369) 65.569,37.962 65.972,37.962 cw(c65.972,37.784) 66.15,37.784 66.15,35.3 66.15,34.665 66.15,33.607 66.15,33.154 66.15,30.5 66.15,20.65 66.781,20.019 70.062,16.738 74.93,16.738 74.989,16.678 74.989,11.836 75.665,11.16 OUT1-.1
AFE_Out1_P: OUT1+.1 R18.2 | length 55.6
  Top Copper w0.102: R18.2 67,54.3 66.252,53.552 66.252,53.468 66.379,53.342 66.379,39.702 66.379,39.537 ccw(c66.556,39.537) 66.556,39.359 67.242,39.359 cw(c67.242,38.953) 67.242,38.546 65.569,38.546 ccw(c65.569,38.369) 65.569,38.191 65.972,38.191 cw(c65.972,37.784) 66.379,37.784 66.379,35.3 66.379,34.665 66.379,33.607 66.379,33.154 66.379,30.5 66.379,20.745 66.862,20.262 70.157,16.966 74.93,16.966 74.989,17.026 74.989,21.868 75.665,22.544 OUT1+.1
AFE_Out2_N: OUT2-.1 R20.2 R27.2 R28.2 | length 53.8
  Top Copper w0.102: R20.2 63,55.5 R27.2@64.2,56.7 ; R27.2 R27.2@64.2,56.7 ; 68.906,44.094 ccw(c69.192,43.807) 68.905,43.519 ccw(c69.192,43.807) 69.48,43.519 70.753,44.792 ; 68.906,44.095 70.178,45.367 ; 69.927,45.619 69.57,45.262 cw(c69.282,45.549) 68.994,45.262 68.878,45.378 67.9,46.356 67.9,54.855 67.604,55.151 66.396,55.151 66.124,54.879 66.124,54.622 65.852,54.35 R28.2 65.2,54.4 64.2,55.4 R27.2@64.2,56.7 ; 69.928,45.62 cw(c70.053,45.493) 70.179,45.367 ; 70.558,42.442 ccw(c70.845,42.154) 70.557,41.867 ccw(c70.845,42.154) 71.132,41.867 72.405,43.14 ; 70.558,42.442 71.831,43.715 ccw(c71.705,43.841) 71.832,43.966 ; 70.754,44.793 cw(c70.879,44.667) 71.004,44.794 ; 71.006,44.792 cw(c70.879,44.667) 71.005,44.541 69.732,43.268 ccw(c70.019,42.98) 69.731,42.693 ccw(c70.019,42.98) 70.306,42.693 71.579,43.966 ; 71.384,41.616 ccw(c71.671,41.328) 71.384,41.041 ccw(c71.671,41.328) 71.958,41.041 73.232,42.314 ; 71.384,41.616 72.657,42.889 ; 71.58,43.967 cw(c71.705,43.841) 71.831,43.967 ; 72.406,43.141 cw(c72.532,43.015) 72.657,43.141 ; 72.657,42.889 ccw(c72.532,43.015) 72.658,43.14 ; 73.233,42.315 cw(c73.358,42.189) 73.483,42.315 ; 73.484,42.314 cw(c73.358,42.189) 73.483,42.063 73.126,41.706 ccw(c73.413,41.418) 73.126,41.13 74.406,39.85 74.751,39.505 74.93,39.505 74.989,39.446 74.989,34.603 75.665,33.928 OUT2-.1
AFE_Out2_P: OUT2+.1 R17.1 R18.1 R19.2 | length 55.7
  Top Copper w0.102: R19.2 63.545,57.5 63.693,57.648 64.803,57.648 66.3,59.145 66.3,59.65 R17.1 66.4,56.7 67,56.1 R18.1 67,56 67.621,55.379 67.699,55.379 68.129,54.949 68.129,46.451 69.04,45.54 69.156,45.423 ; 69.067,43.681 ccw(c69.192,43.807) 69.318,43.681 ; 69.066,43.681 cw(c69.192,43.807) 69.066,43.932 ; 69.067,43.933 70.34,45.206 ccw(c70.053,45.493) 70.374,45.743 70.374,45.747 70.307,45.814 70.303,45.814 ccw(c70.053,45.493) 69.765,45.78 69.409,45.424 ; 69.156,45.423 ccw(c69.282,45.549) 69.408,45.423 ; 69.319,43.681 70.591,44.954 cw(c70.879,44.667) 71.167,44.955 cw(c70.879,44.667) 71.167,44.38 69.893,43.107 ; 69.892,43.106 ccw(c70.019,42.98) 69.893,42.855 ccw(c70.019,42.98) 70.145,42.855 71.417,44.128 cw(c71.705,43.841) 71.993,44.128 cw(c71.705,43.841) 71.993,43.554 70.719,42.28 ; 70.719,42.279 ccw(c70.845,42.154) 70.719,42.029 ccw(c70.845,42.154) 70.971,42.029 ; 70.971,42.029 72.243,43.301 cw(c72.532,43.015) 72.819,43.302 cw(c72.532,43.015) 72.819,42.728 71.546,41.454 ; 71.545,41.453 ccw(c71.671,41.328) 71.797,41.203 73.07,42.475 cw(c73.358,42.189) 73.645,42.476 cw(c73.358,42.189) 73.645,41.901 73.288,41.544 ccw(c73.413,41.418) 73.288,41.292 74.568,40.011 74.846,39.734 74.93,39.734 74.989,39.793 74.989,44.636 75.665,45.312 OUT2+.1
AFE_Out3_N: OUT3-.1 R27.1 | length 55.8
  Top Copper w0.102: R27.1 64.2,58.5 65.223,59.523 65.223,59.977 65.796,60.551 66.905,60.551 67.151,60.796 67.151,60.849 67.151,61.214 68.21,62.273 68.225,62.273 68.39,62.273 ccw(c68.39,62.679) 68.796,62.679 68.796,64.635 cw(c68.974,64.635) 69.152,64.635 69.152,60.368 ccw(c69.558,60.368) 69.965,60.368 69.965,64.635 cw(c70.143,64.635) 70.32,64.635 70.32,60.368 ccw(c70.727,60.368) 71.133,60.368 71.133,64.635 cw(c71.311,64.635) 71.489,64.635 71.489,60.368 ccw(c71.895,60.368) 72.302,60.368 72.302,64.635 cw(c72.479,64.635) 72.657,64.635 72.657,61.054 ccw(c73.064,61.054) 73.47,61.054 73.47,62.095 cw(c73.648,62.095) 73.648,62.273 74.4,62.273 74.93,62.273 74.989,62.213 74.989,57.371 75.665,56.695 OUT3-.1
AFE_Out3_P: OUT3+.1 R17.2 | length 52
  Top Copper w0.102: R17.2@66.4,61.5 R17.2 66.47,61.38 66.993,61.38 68.115,62.502 68.225,62.502 68.39,62.502 ccw(c68.39,62.679) 68.568,62.679 68.568,64.635 cw(c68.974,64.635) 69.381,64.635 69.381,60.368 ccw(c69.558,60.368) 69.736,60.368 69.736,64.635 cw(c70.143,64.635) 70.549,64.635 70.549,60.368 ccw(c70.727,60.368) 70.905,60.368 70.905,64.635 cw(c71.311,64.635) 71.717,64.635 71.717,60.368 ccw(c71.895,60.368) 72.073,60.368 72.073,64.635 cw(c72.479,64.635) 72.886,64.635 72.886,61.054 ccw(c73.064,61.054) 73.241,61.054 73.241,62.095 cw(c73.648,62.095) 73.648,62.502 74.4,62.502 74.93,62.502 74.989,62.561 74.989,67.403 75.665,68.079 OUT3+.1
AFE_Out4_N: OUT4-.1 R20.1 R26.2 U3.18 | length 56.6
  Top Copper w0.102: U3.18 50.313,54.562 50.313,54.916 50.251,54.978 50.251,55.062 50.75,55.561 52.059,55.561 52.844,56.345 57.141,56.345 57.201,56.286 57.201,56.126 R26.2 58.936,55.977 ; R20.1 60.1,55.5 59.623,55.977 58.936,55.977 ; OUT4-.1 75.665,79.463 74.989,80.139 74.989,84.981 74.93,85.041 74.846,85.041 60.129,70.324 60.129,59.271 61.2,58.2 61.2,56.945 60.691,56.437 59.395,56.437 58.936,55.977
AFE_Out4_P: OUT4+.1 R19.1 R25.2 U3.19 | length 54.9
  Top Copper w0.102: U3.19 49.961,54.562 49.961,54.916 50.023,54.978 50.023,55.157 50.655,55.789 51.965,55.789 52.749,56.574 57.141,56.574 57.201,56.633 57.201,56.793 R25.2 58.912,56.942 ; R19.1 60.3,57.5 59.742,56.942 58.912,56.942 ; OUT4+.1 75.665,90.847 74.989,90.171 74.989,85.329 74.93,85.269 74.751,85.269 59.9,70.418 59.9,59.2 58.912,58.212 58.912,56.942
CALCK: J8.2 U3.11 | length 20.8
  Top Copper w0.147: J8.2 42.848,37.7 52.85,47.702 52.85,50.825 52.413,51.262 U3.11
FDA_OUT_N: R7.2 R8.1 R24.2 | length 2.9
  Top Copper w0.102: R7.2 R24.2 R8.1
FDA_OUT_P: R5.2 R6.1 R21.2 | length 2.9
  Top Copper w0.102: R5.2 R21.2 R6.1
FDA_OUT_PR_N: R7.1 U1.12 | length 2.6
  Top Copper w0.102: U1.12 32.856,52.85 32.992,52.986 34.418,52.986 34.766,52.986 34.826,52.926 34.826,52.811 R7.1
FDA_OUT_PR_P: R5.1 U1.13 | length 2.6
  Top Copper w0.102: U1.13 32.856,53.35 32.992,53.214 34.513,53.214 34.766,53.214 34.826,53.274 34.826,53.389 R5.1
FILTER_IN_N: R8.2 U3.27 | length 7.6
  Top Copper w0.102: R8.2 39.546,52.811 39.546,52.926 39.606,52.986 40.167,52.986 45.786,52.986 45.874,52.898 46.172,52.898 46.233,52.837 46.588,52.837 U3.27
FILTER_IN_P: R6.2 U3.26 | length 7.6
  Top Copper w0.102: R6.2 39.546,53.389 39.546,53.274 39.606,53.214 40.072,53.214 45.881,53.214 45.968,53.127 46.172,53.127 46.233,53.188 46.588,53.188 U3.26
GND: C1.1 C2.1 C3.1 C4.1 C5.1 C6.1 C7.1 C8.1 C9.1 C10.1 C11.1 C12.1 C13.1 C15.1 C16.1 C17.1 C19.1 C20.1 GND.1 INPUT.2 J8.1 J11.1 J14.2 OUT1+.2 OUT1-.2 OUT2+.2 OUT2-.2 OUT3+.2 OUT3-.2 OUT4+.2 OUT4-.2 R3.1 R12.1 U1.3 U1.8 U1.9 U1.11 U1.14 U3.33 U4.3 U4.6 U4.7 U5.5 USB1.0 USB1.5 | length 8.1
  Top Copper w0.147: v1(42.825,51) 43.714,51 C8.1
  Top Copper w0.293: v1(42.45,52.05) 42.483,52.083 43.445,52.083 C4.1 ; C20.1 v1(46.97,79.73) ; v1(46.026,56.83) 47.081,56.83 C2.1 ; v1(46.502,55.707) C6.1 ; C9.1 50.499,56.376 50.499,56.781 50.821,57.103 v1(50.821,57.156) ; C7.1 52.775,54.711 52.775,55.35 v1(52.777,55.352) ; C3.1 v1(54.969,55.402)
  other v1: 74.545,3.36 76.462,3.36 78.378,3.36 74.545,6.592 76.462,6.592 78.378,6.592 63.1,9.1 64.3,9.1 65.5,9.1 66.7,9.1 67.9,9.1 63.1,10.3 64.3,10.3 65.5,10.3 66.7,10.3 67.9,10.3 63.1,11.5 64.3,11.5 65.5,11.5 66.7,11.5 67.9,11.5 63.1,12.7 64.3,12.7 65.5,12.7 66.7,12.7 67.9,12.7 63.1,13.9 64.3,13.9 65.5,13.9 66.7,13.9 67.9,13.9 76.638,14.9 78.482,14.9 76.638,16.816 78.482,16.816 76.638,18.733 78.482,18.733 35.3,21.875 36.5,21.875 37.7,21.875 38.9,21.875 40.1,21.875 35.3,23.075 36.5,23.075 37.7,23.075 38.9,23.075 40.1,23.075 35.3,24.275 36.5,24.275 37.7,24.275 38.9,24.275 40.1,24.275 35.3,25.475 36.5,25.475 37.7,25.475 38.9,25.475 40.1,25.475 35.3,26.675 36.5,26.675 37.7,26.675 38.9,26.675 40.1,26.675 76.638,26.884 78.482,26.884 76.638,28.35 78.482,28.35 6.1,29.1 7.3,29.1 8.5,29.1 9.7,29.1 10.9,29.1 76.638,29.817 78.482,29.817 6.1,30.3 7.3,30.3 8.5,30.3 9.7,30.3 10.9,30.3 6.1,31.5 7.3,31.5 8.5,31.5 9.7,31.5 10.9,31.5 6.1,32.7 7.3,32.7 8.5,32.7 9.7,32.7 10.9,32.7 6.1,33.9 7.3,33.9 8.5,33.9 9.7,33.9 10.9,33.9 76.64,37.591 78.483,37.591 76.64,39.507 78.483,39.507 76.64,41.424 78.483,41.424 42.069,43.553 43.985,43.553 45.902,43.553 58.6,45.1 59.8,45.1 61,45.1 62.2,45.1 63.4,45.1 47.125,45.475 58.6,46.3 59.8,46.3 61,46.3 62.2,46.3 63.4,46.3 49.4,46.35 48.375,46.4 58.6,47.5 59.8,47.5 61,47.5 62.2,47.5 63.4,47.5 58.6,48.7 59.8,48.7 61,48.7 62.2,48.7 63.4,48.7 76.638,49.8 78.482,49.8 58.6,49.9 59.8,49.9 61,49.9 62.2,49.9 63.4,49.9 1.05,50.8 2.7,50.8 4.35,50.8 18.855,50.809 76.638,51.092 78.482,51.092 5.3,52.1 76.638,52.384 78.482,52.384 40.091,55.35 42.008,55.35 43.924,55.35 5.3,57.4 40.091,57.426 42.046,57.426 43.962,57.426 29.5,57.75 30.75,57.75 1.05,58.7 2.7,58.7 4.35,58.7 76.679,60.43 78.523,60.43 76.679,62.346 78.523,62.346 6.1,63.6 7.3,63.6 8.5,63.6 9.7,63.6 10.9,63.6 76.679,64.263 78.523,64.263 6.1,64.8 7.3,64.8 8.5,64.8 9.7,64.8 10.9,64.8 6.1,66 7.3,66 8.5,66 9.7,66 10.9,66 53.6,67.1 54.8,67.1 56,67.1 57.2,67.1 58.4,67.1 6.1,67.2 7.3,67.2 8.5,67.2 9.7,67.2 10.9,67.2 53.6,68.3 54.8,68.3 56,68.3 57.2,68.3 58.4,68.3 6.1,68.4 7.3,68.4 8.5,68.4 9.7,68.4 10.9,68.4 53.6,69.5 54.8,69.5 56,69.5 57.2,69.5 58.4,69.5 53.6,70.7 54.8,70.7 56,70.7 57.2,70.7 58.4,70.7 76.638,71.819 78.482,71.819 53.6,71.9 54.8,71.9 56,71.9 57.2,71.9 58.4,71.9 76.638,73.736 78.482,73.736 15,74 18,74 9,74.5 76.638,75.652 78.482,75.652 25.07,77.648 25.986,78.513 7.969,80.283 9.169,80.283 10.369,80.283 7.969,81.483 9.169,81.483 10.369,81.483 39.7,82.2 40.9,82.2 44.5,82.25 31.4,82.4 32.8,82.4 34.2,82.4 7.969,82.683 9.169,82.683 10.369,82.683 76.701,83.163 78.545,83.163 30.8,83.7 32,83.7 33.2,83.7 34.4,83.7 31.5,85 32.55,85 33.6,85 76.701,85.08 78.545,85.08 76.701,86.997 78.545,86.997 75.5,94.797 77.15,94.797 78.8,94.797 73.394,98.714 75.31,98.714 77.227,98.714
  other v2: 48.037,50.912 49.137,50.912 50.237,50.912 48.037,52.012 49.137,52.012 50.237,52.012 48.037,53.112 49.137,53.112 50.237,53.112
NetC14_1: C14.1 U4.4 | length 2.9
  Top Copper w0.508: U4.4 45.01,83.54 45.404,83.146 45.504,83.146 45.6,83.05 C14.1
NetC18_1: C18.1 U5.3
NetC18_2: C18.2 U5.4
NetR1_2: R1.2 R2.1 R3.2 | length 3.6
  Top Copper w0.147: R2.1 R3.2 R1.2
NetR2_2: R2.2 R4.1 R22.2 U1.5 | length 5.8
  Top Copper w0.147: R22.2 R2.2 R4.1 28.697,54.053 29.4,53.35 U1.5
NetR4_2: R4.2 U1.4 | length 2.5
  Top Copper w0.147: R4.2 28.697,54.803 29.65,53.85 U1.4
NetR9_1: R9.1 R11.2 R23.2 U1.6 | length 8.6
  Top Copper w0.147: R11.2 23.725,52.85 R23.2 23.775,52.85 R9.1 U1.6
NetR9_2: R9.2 U1.7 | length 4
  Top Copper w0.147: R9.2@26.399,52.114 26.864,52.114 27.1,52.35 U1.7
NetR10_1: R10.1 U2.1 | length 3.7
  Top Copper w0.147: U2.1 R10.1
NetR10_2: R10.2 R11.1 R12.2 | length 4.2
  Top Copper w0.147: R10.2 R12.2 R11.1
NetR13_1: R13.1 U3.12 | length 17.2
  Top Copper w0.147: R13.1 45.388,39.085 45.54,39.236 45.565,39.236 53.275,46.947 53.275,51.05 52.563,51.762 U3.12
NetR14_1: R14.1 U3.13 | length 17.2
  Top Copper w0.147: R14.1 47.928,39.085 48.08,39.236 48.092,39.236 53.725,44.869 53.725,51.3 52.763,52.262 U3.13
NetR15_1: R15.1 U3.14 | length 17.1
  Top Copper w0.147: R15.1 50.468,39.085 54.2,42.817 54.2,51.5 52.938,52.762 U3.14
NetR16_1: R16.1 U3.15 | length 17.1
  Top Copper w0.147: U3.15 51.623,53.251 53.224,53.251 54.725,51.75 54.725,40.802 53.008,39.085 R16.1
NetR21_1: FDA_OUT+.1 R21.1 | length 4.3
  Top Copper w0.147: FDA_OUT+.1 37.2,56.05 R21.1
NetR22_1: FDA_IN-.1 R22.1 | length 3.4
  Top Copper w0.147: FDA_IN-.1 23.447,54.053 R22.1
NetR23_1: FDA_IN+.1 R23.1 | length 3.8
  Top Copper w0.147: FDA_IN+.1 23.75,51.5 R23.1
NetR24_1: FDA_OUT-.1 R24.1 | length 3.8
  Top Copper w0.147: FDA_OUT-.1 37.2,50.65 R24.1
NetR25_1: FILTER_OUT+.1 R25.1 | length 4.2
  Top Copper w0.147: R25.1 FILTER_OUT+.1
NetR26_1: FILTER_OUT-.1 R26.1 | length 4.2
  Top Copper w0.147: FILTER_OUT-.1 R26.1
SCK: J8.3 R13.2 | length 2.7
  Top Copper w0.147: J8.3 R13.2
SDI: J8.5 R15.2 | length 2.7
  Top Copper w0.147: J8.5 R15.2
SDO: J8.4 R14.2 | length 2.7
  Top Copper w0.147: J8.4 R14.2
SEN: J8.6 R16.2 | length 2.7
  Top Copper w0.147: J8.6 R16.2
TEST_CM: C10.2 J11.2 U3.5 | length 39.7
  Top Copper w0.147: J11.2 22.288,34.35 26.714,34.35 27.375,35.011 27.375,37.25 32.457,42.332 46.447,42.332 50.1,45.986 50.1,47.439 49.78,47.76 49.593,47.76 49.425,47.927 C10.2 49.387,48.019 U3.5
TEST_IN_N: J11.3 U3.30 | length 30.4
  Top Copper w0.102: J11.3 24.056,35.627 24.707,36.277 24.707,36.397 31.175,42.865 38.844,42.865 45.433,49.454 45.433,50.723 45.86,51.151 46.052,51.151 46.135,51.234 46.633,51.234 U3.30
TEST_IN_P: J11.4 U3.31 | length 30.1
  Top Copper w0.102: J11.4 25.569,35.627 25.056,36.14 25.013,36.14 24.935,36.218 24.935,36.302 31.269,42.636 38.938,42.636 45.661,49.359 45.661,50.629 45.955,50.922 46.071,50.922 46.157,50.837 46.588,50.837 U3.31
TEST_OUT_N: J11.6 U3.7 | length 31.2
  Top Copper w0.102: J11.6 30.015,36.782 30.015,39.212 32.656,41.853 46.646,41.853 50.58,45.787 50.58,48.368 50.317,48.632 50.317,49.467 U3.7
TEST_OUT_P: J11.5 U3.6 | length 31.3
  Top Copper w0.102: J11.5 29.787,36.782 29.787,39.306 32.561,42.081 46.551,42.081 50.351,45.882 50.351,48.274 50.113,48.512 49.957,48.668 49.957,49.467 U3.6
USB_5V: C11.2 FB1.1 USB1.1
VCM: C9.2 J14.1 U1.2 U3.20 | length 34.7
  Top Copper w0.147: v1(31.027,56.246) 31.027,55.571 31.498,55.101 31.498,54.252 U1.2
  Top Copper w0.203: U3.20 49.387,55.339 49.592,55.544 C9.2 49.592,56.838 49.774,57.02 v1(49.774,57.154)
  Bottom Copper w0.508: v1(31.027,56.246) 44.431,56.246 45.828,54.849 47.449,54.849 49.754,57.154 v1(49.774,57.154) 49.774,59.893 47.4,62.267 J14.1
pads on no net: U2.3 U3.1 U3.3 U3.8 U3.9 U3.10 U3.17 U3.24 U3.25 U3.29 U3.32 USB1.2 USB1.3 USB1.4

## Polygon pours and split planes (outlines as drawn)
GND on Top Copper "NONET_L-01_P-001" (solid, remove dead copper, pour order 16): 0,95 0,5 ccw(c5,5) 5,0 75,0 ccw(c75,5) 80,5 80,95 ccw(c75,95) 75,100 5,100 ccw(c5,95)
USB_5V on Top Copper "NONET_L-01_P-001" (solid, pour order 1): 3.988,77.089 3.988,76.251 4.013,76.225 11.84,76.225 11.857,76.242 11.857,77.758 4.657,77.758
3.3V on Top Copper "3.3V_L01_P011" (solid, pour order 11): 32.3,59.1 32.3,55.45 32.125,55.275 32.125,51.625 32.062,51.562 31.938,51.562 31.875,51.625 31.875,55.275 31.687,55.462 31.687,59.113 31.5,59.3 24.257,59.3 24.1,59.457 24.1,60.1 24.75,60.75 28.15,60.75 35.7,68.3 41.5,74.1 41.5,80.498 42.277,81.275 44.491,81.275 45.211,80.555 45.211,72.011
+5V on Top Copper "+5V_L01_P002" (solid, pour order 2): 34.63,79.43 38.275,79.43 38.275,80.03 34.807,80.03 34.337,80.5 31.129,80.5 29.1,82.529 29.1,84.2 31.6,86.7 31.6,94.8 29.1,97.3 21,97.3 17.9,94.2 17.9,83.2 15.2,80.5 12.9,80.5 12.3,79.9 12.3,76 20.4,76 23.3,73.1 24.4,73.1 24.4,79.43 29.57,79.43
-5V on Top Copper "-5V_L01_P008" (solid, pour order 8): 24.775,74.475 24.65,74.35 24.65,72.75 23.724,71.824 23.724,68.524 11.225,56.025 11.225,54.075 11.7,53.6 13.375,53.6 25.45,65.675 25.45,74.35 25.325,74.475
+5V on Top Copper "+5V_L01_P012" (solid, pour order 12): 49.012,54.112 49.012,56.299 48.833,56.478 48.833,58.203 48.731,58.304 48.028,58.304 47.933,58.209 47.933,56.478 48.07,56.341 48.07,55.466 47.762,55.158 47.762,54.112
NetC18_2 on Top Copper "NETC18_2_L01_P004" (solid, pour order 4): 25.725,75.875 25.9,75.7 28.25,75.7 28.4,75.85 28.4,77 27.9,77.5 25.8,77.5 25.725,77.425
NetC18_1 on Top Copper "NETC18_1_L01_P005" (solid, pour order 5): 25.725,73.475 25.8,73.4 28,73.4 28.4,73.8 28.4,75.15 28.25,75.3 25.9,75.3 25.725,75.125
GND on Top Copper "GND_L01_P009" (solid, pour order 9): 36.83,82.57 35.1,84.3 35.1,84.7 33.8,86 31,86 29,84 29,82.691 30.991,80.7 36.825,80.7 38.275,80.7 38.975,81.4 41.705,81.4 42.275,81.97 43.725,81.97 43.725,82.57 42.275,82.57 41.745,83.1 38.805,83.1 38.275,82.57
GND on Signal Layer 1 "NONET_L-01_P-001" (solid, remove dead copper, pour order 17): 0,95 0,5 ccw(c5,5) 5,0 75,0 ccw(c75,5) 80,5 80,95 ccw(c75,95) 75,100 5,100 ccw(c5,95)
GND on Signal Layer 2 "NONET_L-01_P-001" (solid, remove dead copper, pour order 18): 0,95 0,5 ccw(c5,5) 5,0 75,0 ccw(c75,5) 80,5 80,95 ccw(c75,95) 75,100 5,100 ccw(c5,95)
+5V on Bottom Copper "NONET_L-01_P-001" (solid, remove dead copper, pour order 21): 0,95 0,5 ccw(c5,5) 5,0 75,0 ccw(c75,5) 80,5 80,95 ccw(c75,95) 75,100 5,100 ccw(c5,95)
GND on Bottom Copper "NONET_L-01_P-001" (solid, pour order 19): 79.85,5.5 79.85,95.597 73.85,95.597 73.85,5.5
GND on Bottom Copper "NONET_L-01_P-001" (solid, pour order 20): 0,59.6 0,50 6,50 6,59.6

## Keep-outs
Keep-Out Layer: